# Allegro board LAUNCHXL-CC1350.brd
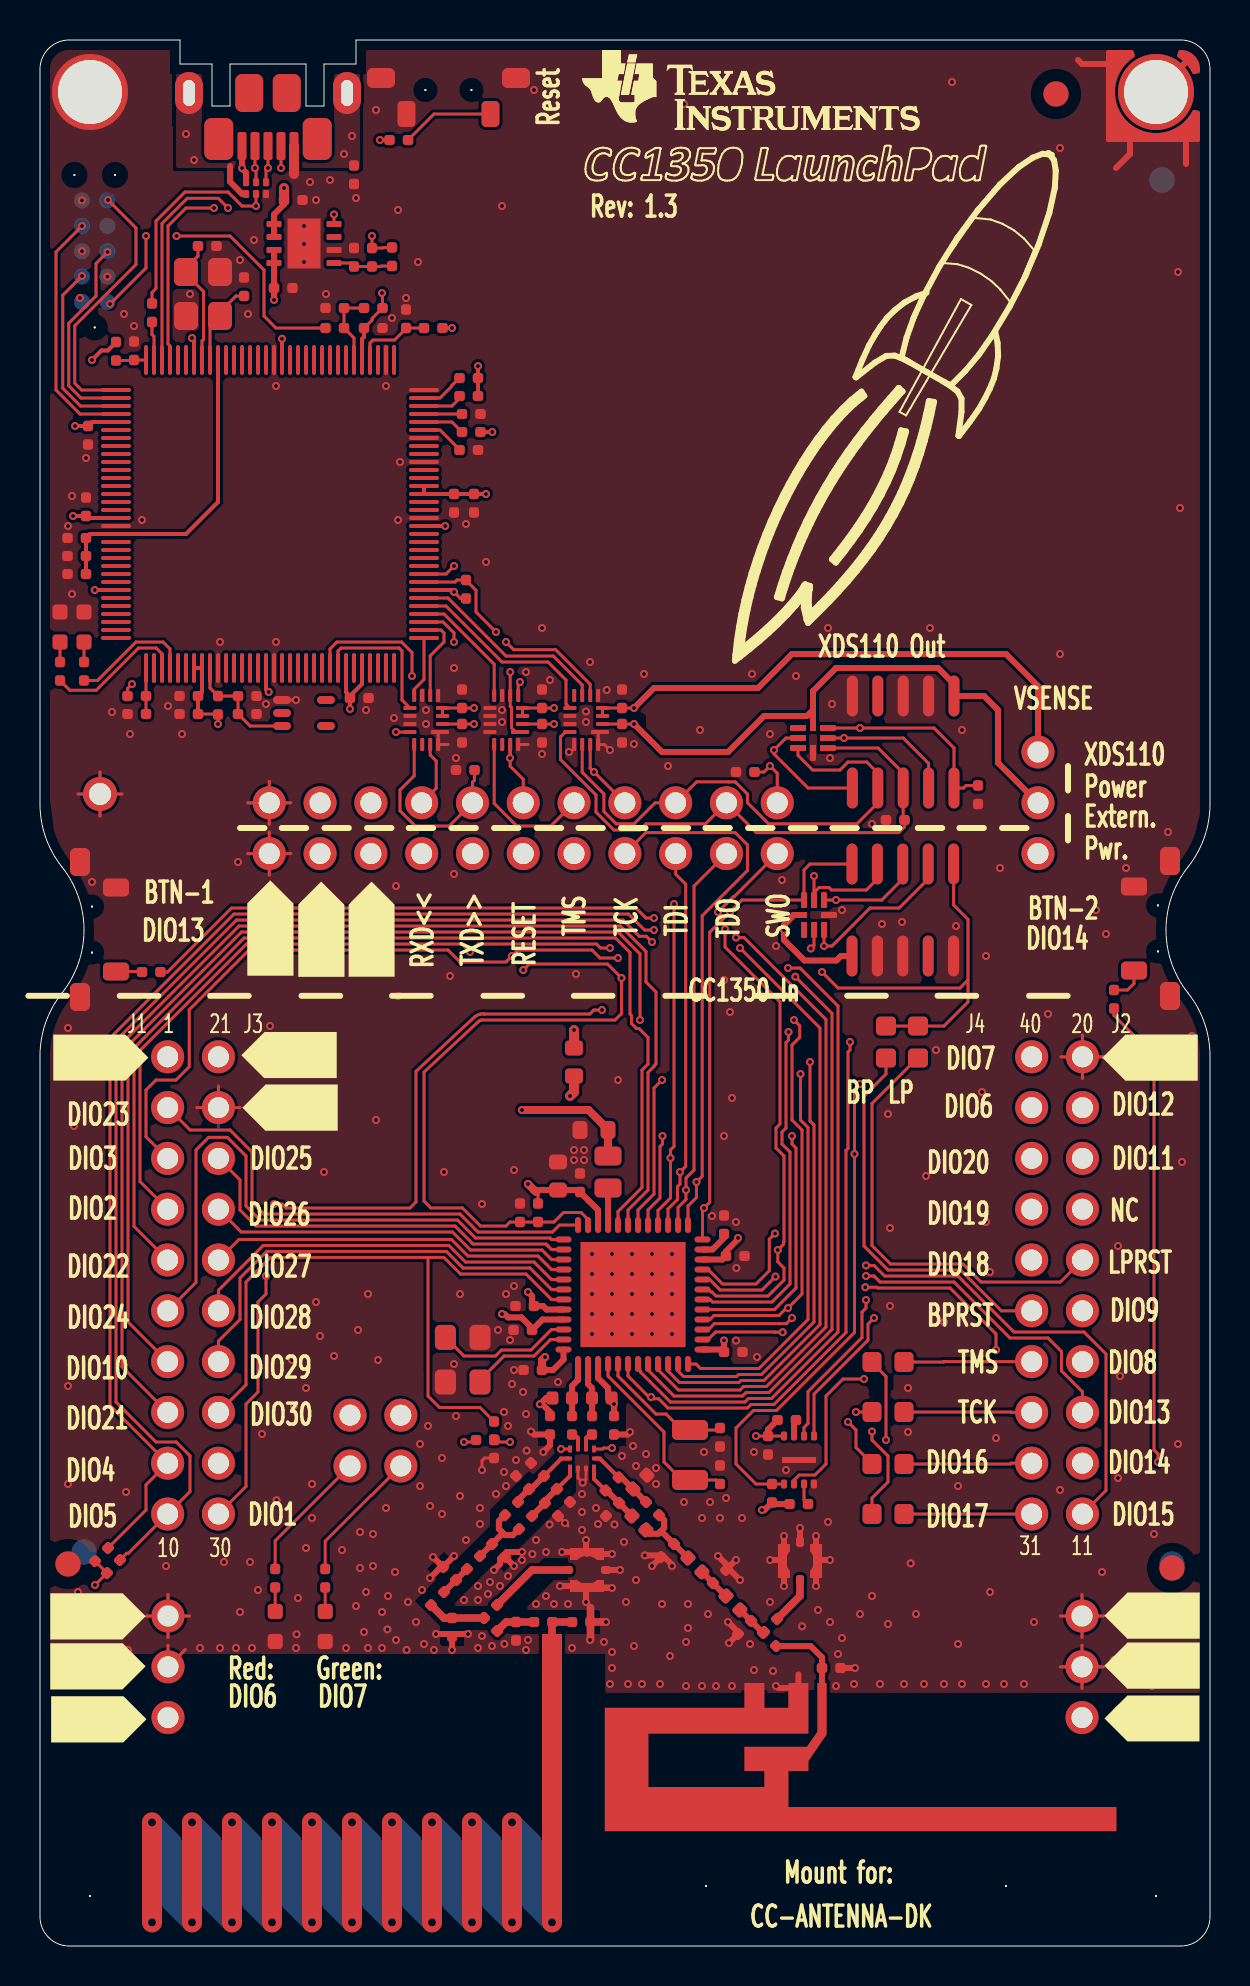
[diagram p0: board, top side]
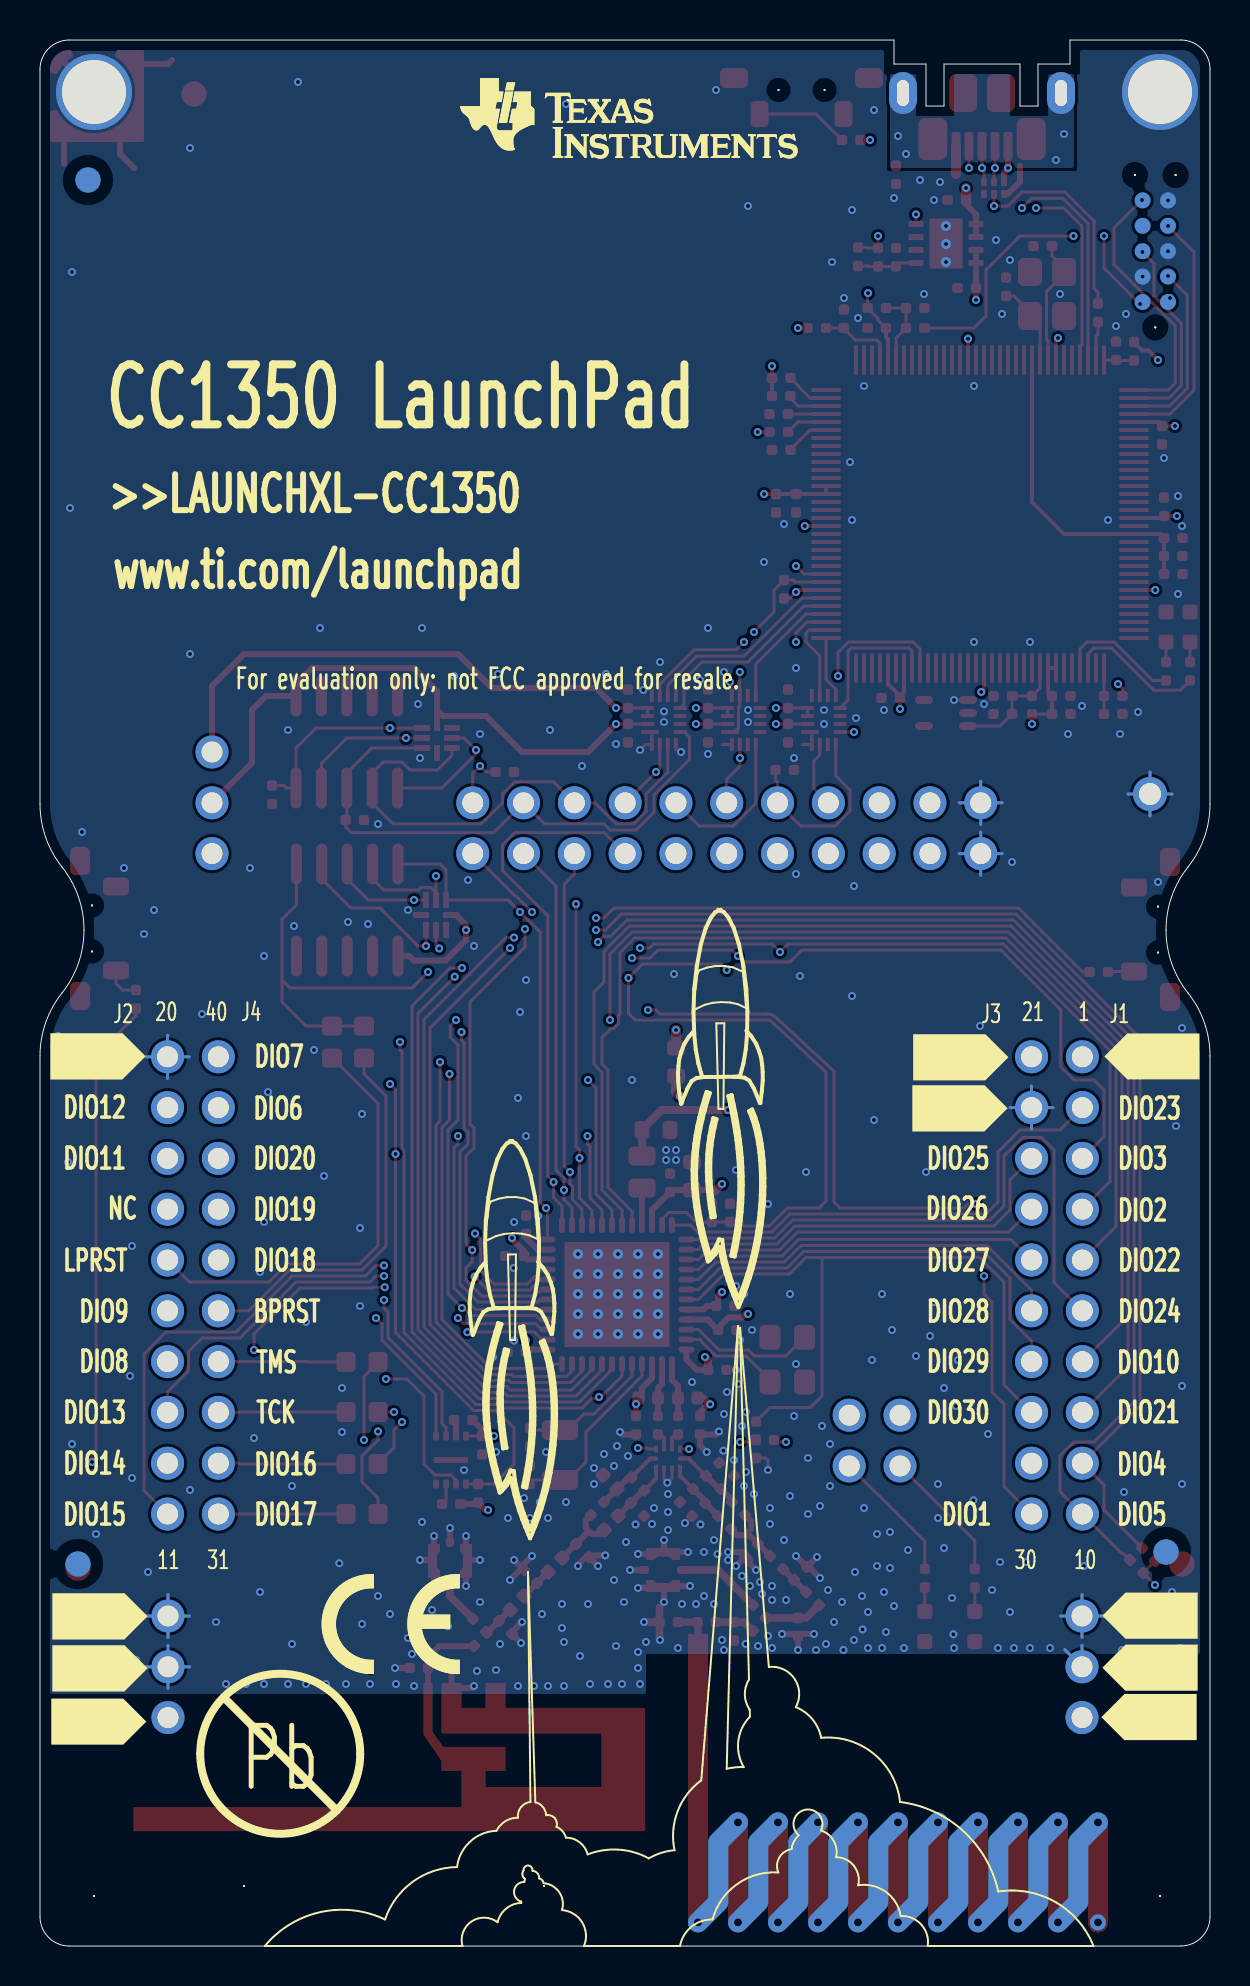
[diagram p1: board, bottom side, seen from below]

Outline 58.5 x 95.3 mm; copper layers: TOP, L2, L3, BOTTOM. Coordinates in mm from the lower left corner of the outline.
Outline path: 0,93.84 0,57.1 arc(0.28,55.43) 1.1,53.95 arc(1.92,52.47) 2.2,50.8 arc(1.92,49.13) 1.1,47.65 arc(0.28,46.17) 0,44.5 0,1.46 arc(0.43,0.43) 1.46,0 57.04,0 arc(58.07,0.43) 58.5,1.46 58.5,44.5 arc(58.22,46.17) 57.4,47.65 arc(56.58,49.13) 56.3,50.8 arc(56.58,52.47) 57.4,53.95 arc(58.22,55.43) 58.5,57.1 58.5,93.84 arc(58.07,94.87) 57.04,95.3 15.8,95.3 15.8,94.1 14.2,94.1 14.2,92 13.3,92 13.3,94.1 9.5,94.1 9.5,92 8.6,92 8.6,94.1 7,94.1 7,95.3 1.46,95.3 arc(0.43,94.87) 0,93.84

## Placement (name value [footprint] x y rotation side)
A1  Antenna PCB helix 868/915MHz  [ANTENNA868_915MHZ_A2N]  25.6 15.1 180 top
A2  2.4GHz  [ANTENNA_DN007AN]  39.1 12.9 180 top
C3  100nF  [CAPC1005X60B2N]  34.2 29.7 0 top
C4  100nF  [CAPC1005X60B2N]  34.3 34.5 0 top
C5  100nF  [CAPC1005X60B2N]  24.7 32 180 top
C6  22uF  [CAPC1608X100A2L]  25.9 37.8 90 top
C7  100nF  [CAPC1005X60B2N]  27 37.7 90 top
C8  22uF  [CAPC1608X100A2L]  28.4 40.8 180 top
C9  100nF  [CAPC1005X60B2N]  25.1 28.8 180 top
C11  3.6pF  [CAPC1005X60B2N]  25.9 21.5 135 top
C12  3.6pF  [CAPC1005X60B2N]  22.6 20.1 315 top
C13  5.6pF  [CAPC1005X60B2N]  20.8 18.3 135 top
C14  3.3pF  [CAPC1005X60B2N]  20.6 16.4 270 top
C15  100pF  [CAPC1005X60B2N]  22.2 16.4 315 top
C16  100nF  [CAPC1005X60B2N]  24.6 30.8 180 top
C17  12pF  [CAPC1005X60B2N]  34 23.1 90 top
C18  12pF  [CAPC1005X60B2N]  34 25.9 270 top
C19  1uF  [CAPC1005X60B2N]  34.2 35.6 90 top
C20  100nF  [CAPC1005X60B2N]  24 36.2 90 top
C21  1pF  [CAPC1005X60B2N]  28.3 21.5 45 top
C22  3.6pF  [CAPC1005X60B2N]  23.9 22.2 225 top
C23  DNM_0402  [CAPC1005X60B2N]  26.6 16.2 0 top
C24  12pF  [CAPC1005X60B2N]  36.8 15 135 top
C30  100nF  [CAPC1005X60B2N]  36.4 25.5 270 top
C32  100nF  [CAPC1005X60B2N]  9.9 62.5 0 top
C33  12pF  [CAPC1005X60B2N]  10.2 82.5 90 top
C34  12pF  [CAPC1005X60B2N]  7.9 85 0 top
C35  10nF  [CAPC1005X60B2N]  15.5 62.4 0 top
C36  10nF  [CAPC1005X60B2N]  2.3 71.5 90 top
C37  10nF  [CAPC1005X60B2N]  2.4 76 270 top
C38  100nF  [CAPC1005X60B2N]  16.2 80.9 0 top
C39  100nF  [CAPC1005X60B2N]  20.7 72.6 270 top
C40  1uF  [CAPC1005X60B2N]  21.7 72.6 270 top
C41  10nF  [CAPC1005X60B2N]  7.9 62.5 180 top
C42  1uF  [CAPC1005X60B2N]  7.9 61.6 180 top
C43  100nF  [CAPC1005X60B2N]  2.3 70.4 180 top
C44  1uF  [CAPC1005X60B2N]  2.3 69.5 180 top
C45  2.2uF  [CAPC1005X60B2N]  2.3 68.6 180 top
C46  100nF  [CAPC1005X60B2N]  18.3 80.9 90 top
C47  15pF  [CAPC1005X60B2N]  16.6 84.9 270 top
C48  2.2uF  [CAPC1005X60B2N]  12.2 87.3 0 top
C49  2.2uF  [CAPC1005X60B2N]  11.7 82.9 0 top
C50  10nF  [CAPC1005X60B2N]  9.9 61.6 0 top
C52  100nF  [CAPC1005X60B2N]  21.1 61.9 90 top
C53  100nF  [CAPC1005X60B2N]  21.1 61.1 270 top
C54  100nF  [CAPC1005X60B2N]  25.1 61.9 90 top
C55  100nF  [CAPC1005X60B2N]  25.1 61.1 270 top
C56  100nF  [CAPC1005X60B2N]  29.1 61.9 90 top
C57  100nF  [CAPC1005X60B2N]  29.1 61.1 270 top
C58  12pF  [CAPC1005X60B2N]  28.7 26.5 270 top
C59  1pF  [CAPC1005X60B2N]  39.1 13.9 0 top
C60  1pF  [CAPC1005X60B2N]  30.3 22.2 315 top
C61  DNM_0402  [CAPC1005X60B2N]  31.7 20.1 225 top
C62  3.6pF  [CAPC1005X60B2N]  34.3 18.8 225 top
C63  12pF  [CAPC1005X60B2N]  26.6 26.5 270 top
C64  12pF  [CAPC1005X60B2N]  27.6 26.5 270 top
C65  12pF  [CAPC1005X60B2N]  25.5 26.5 270 top
C67  DNM_0402  [CAPC1005X60B2N]  36.2 15.7 45 top
C68  1pF  [CAPC1005X60B2N]  34.9 15.6 45 top
C69  DNM_0402  [CAPC1005X60B2N]  22.2 16.4 45 top
C70  100nF  [CAPC1005X60B2N]  4.7 79.3 90 top
C71  DNM_0402  [CAPC1005X60B2N]  24.7 16.2 0 top
C72  3.6pF  [CAPC1005X60B2N]  26.5 22.2 135 top
C73  3.6pF  [CAPC1005X60B2N]  25.2 23.5 135 top
CR1  LPL296-J2L2-25  [LEDC1707X65L]  14.26 15.23 90 top
CR2  LS L296-P2Q2-1  [LEDC1708X67L]  11.76 15.23 90 top
CR4  LS L296-P2Q2-1  [LEDC1708X67L]  1 66.7 270 top
CR5  LPL296-J2L2-25  [LEDC1707X65L]  2.2 66.7 270 top
CR6  TPD4E004DRY  [SON50P100X145X60-6N]  10.3 87.6 0 top
CR7  TPD6E004RSER  [QFN50P150X150X60-8N]  37.9 60.9 270 top
CR8  TPD6E004RSER  [QFN50P150X150X60-8N]  38.2 50.8 0 top
FIDU1  FIDU_1.27mm  [FID127X142]  50.8 92.6 0 top
FIDU2  FIDU_1.27mm  [FID127X142]  1.4 19.1 0 top
FIDU3  FIDU_1.27mm  [FID127X142]  56.6 18.9 0 top
FIDU4  FIDU_1.27mm  [FID127X142]  56.1 88.3 180 bottom
FIDU5  FIDU_1.27mm  [FID127X142]  2.2 19.7 180 bottom
FIDU6  FIDU_1.27mm  [FID127X142]  56.6 19.1 180 bottom
FL1  BLM18HE152SN1  [FIL_BLM18HE152SN1DL]  26.7 43.5 90 top
J1  SSQ-110-23-L-D  [SAMTEC_SSQ11023LD_A2B]  6.38 44.46 0 bottom
J2  SSQ-110-23-L-D  [SAMTEC_SSQ11023LD_A2B]  49.58 44.46 0 bottom
J6  105164-0001  [MOLEX_1051640001_A2N]  10.1 90 0 top
L1  6.8uH  [INDC2012X150L]  28.4 37.9 90 top
L11  2.2nH  [IND_LQW15AN]  29.65 22.85 45 top
L12  6.8nH  [INDC1005X60B2N]  24.6 21.5 225 top
L13  6.8nH  [INDC1005X60B2N]  22 19.5 225 top
L14  7.5nH  [INDC1005X60B2N]  20.2 17.7 225 top
L21  2.2nH  [IND_LQW15AN]  29.6 21.5 315 top
L25  1.5nH  [IND_LQW15AN]  32.4 19.4 315 top
L26  2.2nH  [IND_LQW15AN]  34.3 17.5 315 top
L27  6.8nH  [INDC1005X60B2N]  23.8 23.5 315 top
L28  10nH  [IND_LQW15AN]  26.6 27.4 180 top
L29  10nH  [IND_LQW15AN]  27.6 27.4 0 top
L31  DNM  [INDC1005X60B2N]  28.93 23.43 225 top
L32  DNM  [INDC1005X60B2N]  23.8 16.2 270 top
LBL1  CE_label  [CE_LABEL]  41.8 13.6 180 bottom
LBL2  NON_COMPONENT_LABEL_8mm  [LABEL_PB-FREE_8MM_A2N]  50.7 5.4 180 bottom
M1  SNT-100-BK-G  [SAMTEC_SNT100BKG]  12.7 53.4 90 top
M2  SNT-100-BK-G  [SAMTEC_SNT100BKG]  15.3 53.4 90 top
M3  SNT-100-BK-G  [SAMTEC_SNT100BKG]  17.8 53.4 90 top
M4  SNT-100-BK-G  [SAMTEC_SNT100BKG]  20.3 53.4 90 top
M5  SNT-100-BK-G  [SAMTEC_SNT100BKG]  22.9 53.4 90 top
M6  SNT-100-BK-G  [SAMTEC_SNT100BKG]  25.4 53.4 90 top
M7  SNT-100-BK-G  [SAMTEC_SNT100BKG]  28 53.4 90 top
M8  SNT-100-BK-G  [SAMTEC_SNT100BKG]  30.5 53.4 90 top
M9  SNT-100-BK-G  [SAMTEC_SNT100BKG]  33.1 53.4 90 top
M10  SNT-100-BK-G  [SAMTEC_SNT100BKG]  35.6 53.4 90 top
M11  SNT-100-BK-G  [SAMTEC_SNT100BKG]  38.1 53.4 90 top
M12  SNT-100-BK-G  [SAMTEC_SNT100BKG]  51.2 55.9 90 top
M13  SNT-100-BK-G  [SAMTEC_SNT100BKG]  16.7 22.7 90 top
M14  SNT-100-BK-G  [SAMTEC_SNT100BKG]  19.3 22.7 90 top
MH1  HOLE_3.2mm_NPL  [MTG320]  2.5 2.5 0 top
MH2  HOLE_3.2mm_NPL  [MTG320]  55.8 2.5 0 top
MH3  HOLE_3.2mm_PTH  [MTG320_380]  2.5 92.7 0 top
MH4  HOLE_3.2mm_PTH  [MTG320_380]  55.8 92.7 0 top
MH5  HOLE_1.1mm_PTH  [MTG110_170]  3 57.6 0 top
NOREF  -  []  40.01 0 90 top
NOREF#2  -  []  53 10 0 top
NOREF#3  -  []  17.8 48.4 90 top
NOREF#4  -  []  0.6 43.2 0 top
NOREF#5  #VALUE  [unnamed#2]  33.3 3 0 top
NOREF#6  -  []  8.4 39.5 0 top
NOREF#7  -  []  8.4 42 0 top
NOREF#8  -  []  16.6 46 90 top
NOREF#9  -  []  51.5 11.6 0 top
NOREF#10  -  []  -1.8 14.1 0 top
NOREF#11  -  []  -1.9 8.8 0 top
NOREF#12  -  []  -1.8 11.6 0 top
NOREF#13  -  []  51.4 42 0 top
NOREF#14  -  []  51.5 14.1 0 top
NOREF#15  -  []  13.9 46.2 90 top
NOREF#16  -  []  0 79.15 0 top
NOREF#17  -  []  60.2 14.1 180 bottom
NOREF#18  -  []  17.2 39.5 180 bottom
NOREF#19  -  []  7.1 14.1 180 bottom
NOREF#20  -  []  51.53 65.52 180 bottom
NOREF#21  -  []  60.3 42.1 180 bottom
NOREF#22  -  []  17.3 41.9 180 bottom
NOREF#23  -  []  5.5 43.1 180 bottom
NOREF#24  -  []  7.1 8.9 180 bottom
NOREF#25  -  []  60.2 11.5 180 bottom
NOREF#26  -  []  7.1 11.5 180 bottom
NOREF#27  -  []  58 10 180 bottom
P1  BB02-HC031-KB1-603000  [GRADCONN_BB02HC031KB1603000_A2B]  52.1 11.42 90 top
P2  BB02-HC031-KB1-603000  [GRADCONN_BB02HC031KB1603000_A2B]  6.4 11.42 90 top
P4  BB02-HJ221-KB1-603000  [GRADCONN_BB02HJ221KB160300_A2B]  36.86 57.16 180 top
P5  FTSH-105-01-F-DV-K  [SAMTEC_FTSH-105-01-F-DV-K-10L]  40.6 49.5 0 top
P6  BB02-HJ041-KB1-603000  [GRADCONN_BB02HJ041KB1603000_A2B]  15.5 24 0 top
P7  FTSH-105-01-F-DV-K  [SAMTEC_FTSH-105-01-F-DV-K-10L]  45.7 62.5 180 top
P8  TC2050-IDC-NL  [TAGCONNECT_TC2050IDCNLN]  2.1 82.2 90 bottom
P10  BB02-HC031-KB1-603000  [GRADCONN_BB02HC031KB1603000_A2B]  49.9 59.7 270 top
P11  MM5829-2700  [MURATA_MM58292700RJ4_A2N]  26.4 18.8 0 top
P12  MM5829-2700  [MURATA_MM58292700RJ4_A2N]  38 18.3 90 top
R1  100k  [RESC1005X40B2N]  24.9 36.2 90 top
R2  3.3k  [RESC1005X40B2N]  3.4 19.9 225 top
R3  3.3k  [RESC1005X40B2N]  4 19.3 225 top
R11  2.2k  [RESC1005X40B2N]  36.6 23.1 270 top
R14  220  [RESC1005X40B2N]  11.76 17.93 90 top
R15  180  [RESC1005X40B2N]  14.26 17.93 90 top
R17  10k  [RESC1005X40B2N]  16.2 81.9 0 top
R18  4.7k  [RESC1005X40B2N]  8.9 62.5 270 top
R19  DNM  [RESC1005X40B2N]  5.6 81.2 90 top
R20  100  [RESC1005X40B2N]  15.2 80.9 180 top
R21  DNM  [RESC1005X40B2N]  15.2 81.9 180 top
R22  330k  [RESC1005X40B2N]  5.3 62.5 180 top
R23  180  [RESC1005X40B2N]  1 64.2 270 top
R24  220k  [RESC1005X40B2N]  5.3 61.6 180 top
R25  220  [RESC1005X40B2N]  2.2 64.2 270 top
R27  1k  [RESC1005X40B2N]  21.9 77.5 180 top
R28  4.87k  [RESC1005X40B2N]  21.9 74.8 180 top
R29  1k  [RESC1005X40B2N]  21.1 76.6 0 top
R30  1k  [RESC1005X40B2N]  21.1 75.7 0 top
R31  51  [RESC1005X40B2N]  19.2 80.9 0 top
R32  33k  [RESC1005X40B2N]  15.7 88.1 90 top
R33  51k  [RESC1005X40B2N]  17.6 84 90 top
R34  30k  [RESC1005X40B2N]  15.7 84.9 270 top
R39  1k  [RESC1005X40B2N]  21.9 78.4 180 top
R46  DNM  [RESC1608X55N]  43.2 29.2 180 top
R47  DNM  [RESC1608X55N]  43.2 26.7 180 top
R48  DNM  [RESC1608X55N]  43.2 24.1 180 top
R49  DNM  [RESC1608X55N]  43.2 21.6 180 top
R51  DNM  [RESC1608X55N]  43.9 44.4 90 top
R52  0  [RESC1608X55N]  42.3 46 270 top
R55  100  [RESC1005X40B2N]  53.7 47.8 270 top
R56  100  [RESC1005X40B2N]  5.1 48.7 0 top
R57  100  [RESC1005X40B2N]  18.4 90.3 180 top
R58  3.3k  [RESC1005X40B2N]  21.3 68.3 270 top
R59  DNM  [RESC1005X40B2N]  38.4 22.1 180 top
R60  DNM  [RESC1005X40B2N]  37.8 26.3 180 top
R61  100k  [RESC1005X40B2N]  20.8 58.8 0 top
R62  100k  [RESC1005X40B2N]  34.8 58.7 0 top
R63  100k  [RESC1005X40B2N]  42.3 56.3 0 top
R65  100k  [RESC1005X40B2N]  46.9 57.1 90 top
R66  100  [RESC1005X40B2N]  3.8 80.2 270 top
R67  DNM  [RESC1005X40B2N]  21.8 25.3 0 top
R68  DNM  [RESC1005X40B2N]  22.7 24.4 90 top
R69  0  [RESC1005X40B2N]  22.7 25.3 90 top
SW1  1188E-1K2-V  [SW_1188E1K2V_A2N]  2 54.2 270 top
SW2  1188E-1K2-V  [SW_1188E1K2V_A2N]  56.5 47.5 90 top
SW3  1188E-1K2-V  [SW_1188E1K2V_A2N]  23.8 93.4 180 top
U1  CC1350F128RGZ  [QFNFC50P700X700X80-49CN]  26.9 29.1 0 top
U4  MX25R8035FZUIL0  [SON50P300X200X60-9B2L]  37.2 23.1 0 top
U5  TM4C1294NCPDTT3R  [QFP40P1600X1600X120-128N]  5.3 63.9 0 top
U6  LM4040B25IDCK  [SOT65P210X110-5N]  12.1 62.3 270 top
U7  TPS79601DR  [SON65P300X300X100-9AL]  11.7 86.1 270 top
U8  SN74AVC4T245RSV  [QFNFC40P180X260X55-16A2L]  20 60.7 90 top
U9  SN74AVC4T245RSV  [QFNFC40P180X260X55-16A2L]  28 60.7 90 top
U10  SN74AVC4T245RSV  [QFNFC40P180X260X55-16A2L]  24 60.7 90 top
U11  XMSSJE3G0PA-003  [SW_XMSSJE3G0PA003_A2N]  26.5 23.9 0 top
UNK#REFDES  -  []  28.1 94.8 0 top
UNK#REFDES#2  -  []  36.5 93.4 180 bottom
Y1  32.768kHz  [XTAL_FC-135N]  32.5 23.3 90 top
Y2  24MHz  [OSCCC250X320X60-4L]  22 28.2 90 top
Y3  16MHz  [OSCCC250X320X100-4BN]  9 81.5 90 top

## Library data of the parts
A1 = ANTENNA: User Part Number: #PN
A2 = ANTENNA_DN007
C3-C5 C7 C9 C11-C24 C30 C32-C50 C52-C65 C67-C73 = CAPACITOR: User Part Number: #PN
C6 C8 = CAPACITOR: User Part Number: #PN; alternate symbols: (CAPC1608X100A2L,CAPC1608X100A2M)
CR1 CR5 = LED: alternate symbols: (LEDC1707X65L,LEDC1707X65M)
CR2 CR4 = LED: alternate symbols: (LEDC1708X67L,LEDC1708X67M)
CR6 = DIODE_TPD4E004_SON6: User Part Number: #PN; alternate symbols: (SON50P100X145X65-6L,SON50P100X145X65-6M)
CR7 CR8 = DIODE_TVS_TPD6E004_QFN8_V1_0: alternate symbols: (QFN50P150X150X60-8L,QFN50P150X150X60-8M,QFN50P150X150X60-8AL)
FIDU1-FIDU6 = FIDMARK
FL1 = FILTER_2PIN: alternate symbols: (FIL_BLM18HE152SN1DL,FIL_BLM18HE152SN1DM)
J1 J2 = CONN_HEADER_2X10_J_S_V1: User Part Number: #PN; alternate symbols: (SAMTEC_SSQ11023LD_A2C,SAMTEC_SSQ11023LD_A2A)
J6 = CONN_USB_MICRO_B_2MH: User Part Number: #PN; alternate symbols: (MOLEX_1051640001_A2L,MOLEX_1051640001_A2M)
L1 = INDUCTOR: alternate symbols: (INDC2012X150L,INDC2012X150M)
L11 L21 L26 = INDUCTOR: alternate symbols: (IND_LQW15AL,IND_LQW15AM)
L12-L14 L27 L31 L32 = INDUCTOR: User Part Number: #PN
L25 L28 L29 = INDUCTOR: alternate symbols: (IND_LQW15AM,IND_LQW15AL)
LBL1 = CE_LABEL
LBL2 = LABEL_Pb-free_V1: User Part Number: #PN
M1-M14 = MECH_SHUNT_JUMPER_V1: User Part Number: #PN
MH1 MH2 = HOLE_NPL
MH3-MH5 = HOLE_PTH
NOREF#5 = -: User Part Number: #PN
P1 P2 P10 = CONN_HEADER_3_P_S: User Part Number: #PN; alternate symbols: (GRADCONN_BB02HC031KB1603000_A2C,GRADCONN_BB02HC031KB1603000_A2A)
P4 = CONN_HEADER_2X11_P_S: User Part Number: #PN; alternate symbols: (GRADCONN_BB02HJ221KB160300_A2C,GRADCONN_BB02HJ221KB160300_A2A)
P5 P7 = CONN_HEADER_2X5: alternate symbols: (SAMTEC_FTSH-105-01-F-DV-K-10L,SAMTEC_FTSH-105-01-F-DV-K-10M)
P6 = CONN_HEADER_2X2_P: User Part Number: #PN; alternate symbols: (GRADCONN_BB02HJ041KB1603000_A2C,GRADCONN_BB02HJ041KB1603000_A2A)
P8 = CONN_IDC_TC2050-IDC-NL: User Part Number: #PN; alternate symbols: (TAGCONNECT_TC2050IDCNLL,TAGCONNECT_TC2050IDCNLM)
P11 P12 = CONN_COAX_1_1_P_2MH_V1: User Part Number: #PN; alternate symbols: (MURATA_MM58292700RJ4_A2L,MURATA_MM58292700RJ4_A2M)
R1-R3 R11 R14 R15 R17-R25 R27-R34 R39 R55-R63 R65-R69 = RESISTOR: User Part Number: #PN
R46-R49 R51 R52 = RESISTOR: alternate symbols: (RESC1608X55L,RESC1608X55M)
SW1-SW3 = SWITCH_TACT_V2: alternate symbols: (SW_1188E1K2V_A2L,SW_1188E1K2V_A2M)
U1 = IC_RF_CC13XX_7X7_QFN48_V2: alternate symbols: (QFNFC50P700X700X80-49CL,QFNFC50P700X700X80-49CM)
U4 = IC_FLASH_MX25R8035F_USON8: User Part Number: #PN; alternate symbols: (SON50P300X200X60-9B2L,SON50P300X200X60-9B2M)
U5 = IC_PROC_TM4C1294NCPDT_TQFP128: alternate symbols: (QFP40P1600X1600X120-128L,QFP40P1600X1600X120-128M)
U6 = IC_REF_LM4040_SC70-5: alternate symbols: (SOT65P210X110-5L,SOT65P210X110-5M)
U7 = IC_PM_TPS79601_SON8: alternate symbols: (SON65P300X300X100-9AL,SON65P300X300X100-9AM)
U8-U10 = IC_XCVR_SN74AVC4T245_UQFN16_2: User Part Number: #PN; alternate symbols: (QFNFC40P180X260X55-16A2L,QFNFC40P180X260X55-16A2M)
U11 = IC_SWITCH_XMSSJE3G0PA-00: User Part Number: #PN
Y1 = CRYSTAL: alternate symbols: (XTAL_FC-135L,XTAL_FC-135M)
Y2 = XTAL_4PIN_S: alternate symbols: (OSCCC250X320X60-4L,OSCCC250X320X60-4M)
Y3 = XTAL_4: alternate symbols: (OSCCC250X320X100-4BL,OSCCC250X320X100-4BM)

## Footprints (pads in the part's own frame, mm; a bottom-side part is the same pattern mirrored in y, then rotated)
ANTENNA868_915MHZ_A2N
  rect 1x1 smd: 1(0,0)
ANTENNA_DN007AN
  rect 0.46x0.5 smd: 1(0,0)
  rect 1.001x0.5 smd: 2(1.18,0) 3(3.38,0)
CAPC1005X60B2N
  custom 0.524x0.5 smd: 1(0,0) 2(0.924,0)
CAPC1608X100A2L
  custom 0.75x0.9 smd: 1(0,0) 2(1.4,0)
CE_LABEL
  oval 0.025x0.051 smd: 1(-0.15,0.1)
FID127X142
  round 1.27 smd: 1(0,0)
FIL_BLM18HE152SN1DL
  custom 0.752x0.9 smd: 1(0,0) 2(1.4,0)
GRADCONN_BB02HC031KB1603000_A2B
  round 1.65 hole 1.05: 1(0,0) 2(2.54,0) 3(5.08,0)
GRADCONN_BB02HJ041KB1603000_A2B
  round 1.65 hole 1.05: 1(0,0) 2(0,2.54) 3(2.54,0) 4(2.54,2.54)
GRADCONN_BB02HJ221KB160300_A2B
  round 1.65 hole 1.05: 1(0,0) 2(0,2.54) 3(2.54,0) 4(2.54,2.54) 5(5.08,0) 6(5.08,2.54) 7(7.62,0) 8(7.62,2.54) 9(10.16,0) 10(10.16,2.54) 11(12.7,0) 12(12.7,2.54) 13(15.24,0) 14(15.24,2.54) 15(17.78,0) 16(17.78,2.54) 17(20.32,0) 18(20.32,2.54) 19(22.86,0) 20(22.86,2.54) 21(25.4,0) 22(25.4,2.54)
IND_LQW15AN
  custom 0.6x0.65 smd: 1(0,0) 2(0.98,0)
INDC1005X60B2N
  custom 0.524x0.5 smd: 1(0,0) 2(0.924,0)
INDC2012X150L
  custom 0.95x1.352 smd: 1(0,0) 2(1.6,0)
LEDC1707X65L
  custom 0.752x0.752 smd: 1(0,0) 2(1.501,0)
LEDC1708X67L
  custom 0.752x0.752 smd: 1(0,0) 2(1.501,0)
MOLEX_1051640001_A2N
  custom 1.45x2.1 smd: (-1.162,0.35) (3.762,0.35)
  custom 1.4x1.9 smd: (0.362,2.65) (2.238,2.65)
  custom 0.45x1.4 smd: 1(0,0) 2(0.65,0) 3(1.3,0) 4(1.95,0) 5(2.6,0)
  oval 1.4x2.1 hole 0.6x1.3: M1(-2.65,2.65) M2(5.25,2.65)
MTG110_170
  round 1.699 hole 1.1: 1(0,0)
MTG320
  round 0.099 hole 3.2 unplated: (0,0)
MTG320_380
  round 3.8 hole 3.2: 1(0,0)
MURATA_MM58292700RJ4_A2N
  custom 0.5x0.4 smd: 1(0,0) 2(1.9,0)
  custom 1.7x0.6 smd: M1(0.95,-0.8) M2(0.95,0.8)
OSCCC250X320X60-4L
  custom 1.25x1.052 smd: 1(0,0) 2(2.23,0) 3(2.23,1.73) 4(0,1.73)
OSCCC250X320X100-4BN
  custom 1.402x1.198 smd: 1(0,0) 2(2.2,0) 3(2.2,1.699) 4(0,1.699)
QFN50P150X150X60-8N
  custom 0.3x0.8 smd: 1(0,0) 2(0.5,0) 3(1,0) 5(1,1.5) 6(0.5,1.5) 7(0,1.5)
  custom 0.8x0.3 smd: 4(1.25,0.75) 8(-0.25,0.75)
QFNFC40P180X260X55-16A2L
  custom 0.2x0.9 smd: 1(0,0)
  custom 0.2x0.65 smd: 2(0.4,-0.125) 3(0.8,-0.125) 4(1.2,-0.125) 9(1.2,1.505) 10(0.8,1.505) 11(0.4,1.505) 12(0,1.505)
  custom 0.65x0.2 smd: 5(1.825,0.09) 6(1.825,0.49) 7(1.825,0.89) 8(1.825,1.29) 13(-0.625,1.29) 14(-0.625,0.89) 15(-0.625,0.49) 16(-0.625,0.09)
QFNFC50P700X700X80-49CN
  oval 0.3x0.8 smd: 1(0,0) 2(0.5,0) 3(1.001,0) 4(1.501,0) 5(1.999,0) 6(2.499,0) 7(3,0) 8(3.5,0) 9(4,0) 10(4.501,0) 11(5.001,0) 12(5.499,0) 25(5.499,6.949) 26(5.001,6.949) 27(4.501,6.949) 28(4,6.949) 29(3.5,6.949) 30(3,6.949) 31(2.499,6.949) 32(1.999,6.949) 33(1.501,6.949) 34(1.001,6.949) 35(0.5,6.949) 36(0,6.949)
  oval 0.8x0.3 smd: 13(6.226,0.724) 14(6.226,1.224) 15(6.226,1.725) 16(6.226,2.225) 17(6.226,2.725) 18(6.226,3.226) 19(6.226,3.726) 20(6.226,4.224) 21(6.226,4.724) 22(6.226,5.225) 23(6.226,5.725) 24(6.226,6.226) 37(-0.724,6.226) 38(-0.724,5.725) 39(-0.724,5.225) 40(-0.724,4.724) 41(-0.724,4.224) 42(-0.724,3.726) 43(-0.724,3.226) 44(-0.724,2.725) 45(-0.724,2.225) 46(-0.724,1.725) 47(-0.724,1.224) 48(-0.724,0.724)
  rect 5.25x5.25 smd: 49(2.751,3.475)
QFP40P1600X1600X120-128N
  oval 0.201x1.501 smd: 1(0,0) 2(0.399,0) 3(0.8,0) 4(1.199,0) 5(1.6,0) 6(1.999,0) 7(2.4,0) 8(2.799,0) 9(3.2,0) 10(3.599,0) 11(4,0) 12(4.399,0) 13(4.801,0) 14(5.199,0) 15(5.601,0) 16(6,0) 17(6.401,0) 18(6.8,0) 19(7.201,0) 20(7.6,0) 21(8.001,0) 22(8.4,0) 23(8.801,0) 24(9.2,0) 25(9.601,0) 26(10,0) 27(10.399,0) 28(10.8,0) 29(11.199,0) 30(11.6,0) 31(11.999,0) 32(12.4,0) 65(12.4,15.4) 66(11.999,15.4) 67(11.6,15.4) 68(11.199,15.4) 69(10.8,15.4) 70(10.399,15.4) 71(10,15.4) 72(9.601,15.4) 73(9.2,15.4) 74(8.801,15.4) 75(8.4,15.4) 76(8.001,15.4) 77(7.6,15.4) 78(7.201,15.4) 79(6.8,15.4) 80(6.401,15.4) 81(6,15.4) 82(5.601,15.4) 83(5.199,15.4) 84(4.801,15.4) 85(4.399,15.4) 86(4,15.4) 87(3.599,15.4) 88(3.2,15.4) 89(2.799,15.4) 90(2.4,15.4) 91(1.999,15.4) 92(1.6,15.4) 93(1.199,15.4) 94(0.8,15.4) 95(0.399,15.4) 96(0,15.4)
  oval 1.501x0.201 smd: 33(13.899,1.501) 34(13.899,1.9) 35(13.899,2.301) 36(13.899,2.7) 37(13.899,3.099) 38(13.899,3.5) 39(13.899,3.899) 40(13.899,4.3) 41(13.899,4.699) 42(13.899,5.1) 43(13.899,5.499) 44(13.899,5.9) 45(13.899,6.299) 46(13.899,6.7) 47(13.899,7.099) 48(13.899,7.501) 49(13.899,7.899) 50(13.899,8.301) 51(13.899,8.7) 52(13.899,9.101) 53(13.899,9.5) 54(13.899,9.901) 55(13.899,10.3) 56(13.899,10.701) 57(13.899,11.1) 58(13.899,11.501) 59(13.899,11.9) 60(13.899,12.301) 61(13.899,12.7) 62(13.899,13.099) 63(13.899,13.5) 64(13.899,13.899) 97(-1.501,13.899) 98(-1.501,13.5) 99(-1.501,13.099) 100(-1.501,12.7) 101(-1.501,12.301) 102(-1.501,11.9) 103(-1.501,11.501) 104(-1.501,11.1) 105(-1.501,10.701) 106(-1.501,10.3) 107(-1.501,9.901) 108(-1.501,9.5) 109(-1.501,9.101) 110(-1.501,8.7) 111(-1.501,8.301) 112(-1.501,7.899) 113(-1.501,7.501) 114(-1.501,7.099) 115(-1.501,6.7) 116(-1.501,6.299) 117(-1.501,5.9) 118(-1.501,5.499) 119(-1.501,5.1) 120(-1.501,4.699) 121(-1.501,4.3) 122(-1.501,3.899) 123(-1.501,3.5) 124(-1.501,3.099) 125(-1.501,2.7) 126(-1.501,2.301) 127(-1.501,1.9) 128(-1.501,1.501)
RESC1005X40B2N
  custom 0.524x0.5 smd: 1(0,0) 2(0.924,0)
RESC1608X55N
  custom 0.95x1 smd: 1(0,0) 2(1.6,0)
SAMTEC_FTSH-105-01-F-DV-K-10L
  oval 0.551x2.05 smd: 1(0,0) 2(0,4.6) 3(1.27,0) 4(1.27,4.6) 5(2.54,0) 6(2.54,4.6) 7(3.81,0) 8(3.81,4.6) 9(5.08,0) 10(5.08,4.6)
SAMTEC_SSQ11023LD_A2B
  round 1.65 hole 1.05: 1(0,0) 2(2.54,0) 3(0,2.54) 4(2.54,2.54) 5(0,5.08) 6(2.54,5.08) 7(0,7.62) 8(2.54,7.62) 9(0,10.16) 10(2.54,10.16) 11(0,12.7) 12(2.54,12.7) 13(0,15.24) 14(2.54,15.24) 15(0,17.78) 16(2.54,17.78) 17(0,20.32) 18(2.54,20.32) 19(0,22.86) 20(2.54,22.86)
SON50P100X145X60-6N
  custom 0.3x0.402 smd: 1(0,0) 2(0.5,0) 3(1.001,0) 4(1.001,0.589) 5(0.5,0.589) 6(0,0.589)
SON50P300X200X60-9B2L
  custom 0.3x0.45 smd: 1(0,0) 2(0.5,0) 3(1,0) 4(1.5,0) 5(1.5,2.4) 6(1,2.4) 7(0.5,2.4) 8(0,2.4)
  rect 1.7x0.3 smd: 9(0.75,1.2)
SON65P300X300X100-9AL
  custom 0.3x0.75 smd: 1(0,0) 2(0.65,0) 3(1.3,0) 4(1.95,0) 5(1.95,3) 6(1.3,3) 7(0.65,3) 8(0,3)
  rect 2.5x1.65 smd: 9(0.975,1.5)
SOT65P210X110-5N
  oval 0.399x0.899 smd: 1(0,0) 2(0.65,0) 3(1.3,0) 4(1.3,2.2) 5(0,2.2)
SW_1188E1K2V_A2N
  round 0.099 hole 0.899 unplated: (2.229,0.6) (4.529,0.6)
  custom 1.4x1 smd: 1(0,0) 2(6.75,0)
  custom 0.9x1.3 smd: 3(1.275,1.8) 4(5.475,1.8)
SW_XMSSJE3G0PA003_A2N
  custom 0.2x0.35 smd: 1(0,0) 4(1.2,0) 6(1.2,0.95) 9(0,0.95)
  custom 0.2x0.3 smd: 2(0.4,-0.025) 3(0.8,-0.025) 7(0.8,0.975) 8(0.4,0.975)
  custom 0.35x0.2 smd: 5(1.275,0.475) 10(-0.075,0.475)
TAGCONNECT_TC2050IDCNLN
  round 0.099 hole 1.001 unplated: (-1.27,0.635) (6.35,-0.38) (6.35,1.65)
  round 0.8 smd: 1(0,0) 2(1.27,0) 3(2.54,0) 4(3.81,0) 5(5.08,0) 6(5.08,1.27) 7(3.81,1.27) 8(2.54,1.27) 9(1.27,1.27) 10(0,1.27)
unnamed#2
  round 0.099 hole 3.2 unplated: (0,0) (15,0)
XTAL_FC-135N
  custom 1x1.798 smd: 1(0,0) 2(2.499,0)

## Nets
+5V: J1.2 P2.1 P4.20
GND: A2.2(GND_2) A2.3(GND_3) C3.2 C4.2 C5.2 C6.2 C7.2 C8.2 C9.2 C11.1 C12.2 C13.2 C14.2 C16.2 C17.2 C18.2 C19.2 C20.2 C21.1 C23.2 C30.2 C32.2 C33.2 C34.2 C35.2 C36.2 C37.2 C38.2 C39.2 C40.2 C41.2 C42.2 C43.2 C44.2 C45.2 C46.2 C48.2 C49.2 C50.2 C52.2 C53.2 C54.2 C55.2 C56.2 C57.2 C58.2 C59.2 C61.2 C62.1 C65.2 C68.1 C70.2 C72.1 C73.2 CR1.1(C) CR2.1(C) CR4.1(C) CR5.1(C) CR6.3 CR7.4(GND) CR8.4(GND) J1.4 J2.2 J6.5(GND) L11.2 L27.1 L32.2 MH3.1 MH4.1 MH5.1 P1.2 P1.3 P2.2 P2.3 P4.21 P4.22 P5.3 P5.5 P5.9 P7.3 P7.5 P7.9 P8.3(7) P8.5(8) P8.9(10) P11.2 P11.M1 P11.M2 P12.2 P12.M1 P12.M2 R21.2 R24.2 R28.1 R29.2 R32.1 R34.1 R61.1 R62.1 R63.1 R65.1 R68.1 SW1.1 SW1.2 SW1.3 SW2.1 SW2.2 SW2.4 SW3.1 SW3.2 SW3.4 U1.49(VSS) U4.4(GND) U4.9(EGP) U5.10(GNDA) U5.17(GND#17) U5.48(GND#48) U5.55(GND#55) U5.58(GND#58) U5.64(NWAKE) U5.66(XOSC0) U5.80(GND#80) U5.114(GND#114) U6.1(ANODE) U7.6(GND) U7.9(GND/TAB) U8.1(1NOE) U8.5(2DIR) U8.7(1A2) U8.10(GND#10) U8.11(GND#11) U8.16(2NOE) U9.1(1NOE) U9.5(2DIR) U9.10(GND#10) U9.11(GND#11) U9.13(2B1) U9.16(2NOE) U10.7(1A2) U10.9(2A2) U10.10(GND#10) U10.11(GND#11) U10.12(2B2) U10.16(2NOE) U11.2(GND#2) U11.3(GND#3) Y2.2 Y2.4 Y3.2(GND) Y3.4(NC_4)
VDDC: C43.1 C44.1 C45.1 U5.87(VDDC#87) U5.115(VDDC#115)
VDDR: C8.1 C9.1 C16.1 L1.2 U1.45(VDDR#45) U1.48(VDDR#48)
VDDS: C3.1 C4.1 C5.1 C6.1 C7.1 FL1.1 R1.2 R67.1 U1.13(VDDS2) U1.22(VDDS3) U1.34(VDDS_DCDC) U1.44(VDDS)
CC1350_RESET: C20.1 CR8.2(IO2) P4.12 P5.10 R1.1 R51.2 R52.1 U1.35(RESET_N)
CC1350_RXD: J1.7 P4.16 U1.7(DIO_2)
CC1350_SW_PWR: J1.16 R69.2 U1.43(DIO_30)
CC1350_SWO: J2.9 P4.2 U1.28(DIO_18)
CC1350_TCK: CR8.6(IO5) P4.8 P5.4 R47.2 U1.25(JTAG_TCKC)
CC1350_TMS: CR8.7(IO6) P4.10 P5.2 R46.2 U1.24(JTAG_TMSC)
CC1350_TXD: J1.5 P4.14 U1.8(DIO_3)
CC1350_VDD: C30.1 CR8.8(VCC) FL1.2 J1.1 P1.1 P4.18 P5.1 P10.3 R2.2 R3.2 R11.2 R59.2 R60.2 U4.8(VCC)
DCDC_SW: L1.1 U1.33(DCDC_SW)
DIO1_RF_SW: J1.20 U1.6(DIO_1) U11.6(CTL)
DIO4_SCL: J1.17 R2.1 U1.9(DIO_4)
DIO5_SDA: J1.19 R3.1 U1.10(DIO_5)
DIO6_RLED: J2.3 P6.2 U1.11(DIO_6)
DIO7_GLED: J2.1 P6.4 U1.12(DIO_7)
DIO8_MISO: J2.14 U1.14(DIO_8) U4.2(SO/SIO1)
DIO9_MOSI: J2.12 U1.15(DIO_9) U4.5(SI/SIO0)
DIO10_SCLK: J1.13 U1.16(DIO_10) U4.6(SCLK)
DIO11_CS: J2.6 U1.17(DIO_11)
DIO12: J2.4 U1.18(DIO_12)
DIO13_BTN1: J2.16 R56.2 U1.19(DIO_13)
DIO14_BTN2: J2.18 R55.2 U1.20(DIO_14)
DIO15: J2.20 U1.21(DIO_15)
DIO16_TDO: CR8.5(IO4) P4.4 P5.6 R48.2 U1.26(DIO_16)
DIO17_TDI: CR8.3(IO3) P4.6 P5.8 R49.2 U1.27(DIO_17)
DIO19_CTS: J2.7 U1.29(DIO_19)
DIO20_FLASH_CS: J2.5 R11.1 U1.30(DIO_20) U4.1(NCS)
DIO21: J1.15 U1.31(DIO_21)
DIO22: J1.9 U1.32(DIO_22)
DIO23_ANALOG: J1.3 U1.36(DIO_23)
DIO24_ANALOG: J1.11 U1.37(DIO_24)
DIO25_ANALOG: J1.6 U1.38(DIO_25)
DIO26_ANALOG: J1.8 U1.39(DIO_26)
DIO27_ANALOG: J1.10 U1.40(DIO_27)
DIO28_ANALOG: J1.12 U1.41(DIO_28)
DIO29_ANALOG: J1.14 U1.42(DIO_29)
IRSTN: P8.10(5) R20.2
ITCK: P8.4(2) U5.100(PC0/TCK/SWCLK)
ITDI: P8.8(4) U5.98(PC2/TDI)
ITDO: P8.6(3) U5.97(PC3/TDO/SWO)
ITMS: P8.2(1) U5.99(PC1/TMS/SWDIO)
LP_RESET: J2.10 R51.1
USB_DM: CR6.5 J6.2(D-) U5.93(PL7/USB0DM)
USB_DP: CR6.4 J6.3(D+) U5.94(PL6/USB0DP)
USB_ID: CR6.2 J6.4(ID) R19.2
USB_VBUS: C48.1 CR6.6 J6.1(VCC) P4.19 R22.2 R66.1 U7.1(IN#1) U7.2(IN#2) U7.8(EN)
V-SENSE: C53.1 C55.1 C57.1 CR7.8(VCC) P7.1 P10.2 U8.2(VCCB) U9.2(VCCB) U10.2(VCCB)
XDS_RESET: R58.1 U5.40(PA6) U10.1(1NOE) U10.6(1A1)
XDS_RESET_LS: CR7.2(IO2) P4.11 P7.10 R57.2 U10.15(1B1)
XDS_RX: U5.33(PA0/U0RX) U8.8(2A1)
XDS_RX_LS: P4.13 R61.2 U8.13(2B1)
XDS_SWO: U5.25(PC4/C1-) U8.9(2A2)
XDS_SWO_LS: P4.1 R62.2 U8.12(2B2)
XDS_TCK: U5.35(PA2/SSI0CLK) U9.6(1A1)
XDS_TDI: U5.38(PA5/SSI0XDAT1) U9.7(1A2)
XDS_TDI_LS: CR7.3(IO3) P4.5 P7.8 U9.14(1B2)
XDS_TDO: U5.37(PA4/SSI0XDAT0) U9.9(2A2)
XDS_TDO_LS: CR7.5(IO4) P4.3 P7.6 R63.2 U9.12(2B2)
XDS_TMS: U5.36(PA3/SSI0FSS) U10.8(2A1)
XDS_TMS_DIR: U5.24(PC5/C1+) U10.5(2DIR)
XDS_TMS_LS: CR7.7(IO6) P4.9 P7.2 R65.2 U10.13(2B1)
XDS_TX: U5.34(PA1/U0TX) U8.6(1A1)
XDS_TX_LS: P4.15 U8.15(1B1)
XDS_VCC: C35.1 C36.1 C37.1 C38.1 C39.1 C40.1 C41.1 C42.1 C47.1 C49.1 C52.1 C54.1 C56.1 P4.17 P8.1(6) P10.1 R17.2 R18.2 R27.1 R30.2 R31.2 R33.2 R39.1 R58.2 U5.7(VDD#7) U5.8(VDDA) U5.16(VDD#16) U5.26(VDD#26) U5.28(VDD#28) U5.39(VDD#39) U5.47(VDD#47) U5.51(VDD#51) U5.52(VDD#52) U5.69(VDD#69) U5.79(VDD#79) U5.90(VDD#90) U5.101(VDD#101) U5.113(VDD#113) U5.122(VDD#122) U7.3(OUT#3) U7.4(OUT#4) U8.3(VCCA) U8.4(1DIR) U9.3(VCCA) U9.4(1DIR) U10.3(VCCA) U10.4(1DIR)
N1013277: U1.46(X24M_N) Y2.3
N1013855: C22.1 C73.1 L27.2 U11.10(PORT3-)
N1013859: C11.2 C72.2 L12.1 U11.1(PORT3+)
N1013899: C12.1 C22.2 L12.2 L13.1
N1013927: C13.1 L13.2 L14.1
N1013977: A1.1(FEED/GND_1) C23.1 C71.2
N1014101: C17.1 U1.4(X32K_Q1) Y1.1
N1014113: C18.1 U1.5(X32K_Q2) Y1.2
N1018952: U1.47(X24M_P) Y2.1
N1105722: CR1.2(A) R15.1
N1105771: CR2.2(A) R14.1
N1105824: P6.1 R14.2
N1106228: P6.3 R15.2
N1176544: J2.13 R46.1
N1176548: J2.15 R47.1
N1176568: J2.17 R48.1
N1177007: J2.19 R49.1
N1240270: CR7.6(IO5) P4.7 P7.4 U9.15(1B1)
N1288065: R55.1 SW2.3
N1288098: R56.1 SW1.4
N1299607: J2.11 R52.2
N1384129: R57.1 SW3.3
N1393569: C19.1 U1.23(DCOUPL)
N1403554: C58.1 C65.1 L28.2 L29.2 U1.3(RX_TX)
N1414078: C14.1 C15.1 C69.1 L14.2
N1417883: C63.1 L28.1 U1.1(RF_P)
N1418253: C64.1 L29.1 U1.2(RF_N)
N1419138: C21.2 L21.1 L31.2 U11.4(PORT2-)
N1419146: C60.1 L11.1 L31.1 U11.5(PORT2+)
N1419182: C60.2 C61.1 L21.2 L25.1
N1419210: C62.2 L25.2 L26.1
N1419230: A2.1(FEED_1) C24.1 C59.1
N1419286: C24.2 C67.1 C68.2 L26.2
N1420906: C64.2 U11.7(PORT1+)
N1421284: R67.2 R68.2 R69.1 U11.9(VDD)
N1433060: C15.2 C71.1 L32.1
N1447877: R59.1 U4.3(NWP/SIO2)
N1447884: R60.1 U4.7(NRST/SIO3)
N1465309: C63.2 U11.8(PORT1-)
N1466589: C69.2 P11.1
N1466981: C67.2 P12.1
N1587996: R17.1 R20.1 R21.1 U5.70(NRST)
N1588002: R30.1 U5.60(PK7)
N1588004: C47.2 R33.1 R34.2 U7.5(FB)
N1588016: R28.2 U5.59(RBIAS)
N1588028: R22.1 R24.1 U5.1(PD0/AIN15)
N1588034: C34.1 U5.89(OSC1) Y3.3
N1588038: C33.1 U5.88(OSC0) Y3.1
N1588066: C32.1 C50.1 R18.1 U5.9(VREFA+) U6.3(CATHODE)
N1588110: R19.1 U5.95(PB0/USB0ID)
N1588130: R39.2 U5.63(PK4)
N1588132: R29.1 U5.61(PK6)
N1588134: R27.2 U5.62(PK5)
N1588248: C46.1 R31.1 U5.68(VBAT)
N1588328: R23.2 U5.3(PD2/AIN13)
N1588330: R25.2 U5.4(PD3/AIN12)
N1588336: CR6.1 J6.M1(SHIELD1) J6.M2(SHIELD2) R32.2
N1588554: C70.1 R66.2 U5.96(PB1/USB0VBUS)
N15894280: CR4.2(A) R23.1
N15894940: CR5.2(A) R25.1

Pads without a net: CR7 1; CR8 1; FIDU1 1; FIDU2 1; FIDU3 1; FIDU4 1; FIDU5 1; FIDU6 1; J1 18; J2 8; LBL1 1; P5 7; P7 7; P8 7; U5 2 5 6 11 12 13 14 15 18 19 20 21 22 23 27 29 30 31 32 41 42 43 44 45 46 49 50 53 54 56 57 65 67 71 72 73 74 75 76 77 78 81 82 83 84 85 86 91 92 102 103 104 105 106 107 108 109 110 111 112 116 117 118 119 120 121 123 124 125 126 127 128; U6 2 4 5; U7 7; U8 14; U9 8; U10 14

## Via types
v1: diameter 0.4, hole 0.2, TOP to BOTTOM, 505 vias
v2: diameter 0.8, hole 0.4, TOP to BOTTOM, 21 vias
v3: diameter 0.5, hole 0.201, TOP to BOTTOM, 28 vias

## Routing (per net, layer and track width the routed paths; a pad name or vN(x,y) marks a point on that pad's centre or on a via; arc(x,y) is an arc through that point)
+5V: length 55.4
  L3 w0.5: P2.1 0.8,17.02 0.8,41.9 4.7,45.8 7.58,45.8 J1.2 8.92,46.22 14,51.3 P4.20
GND: length 172.9
  TOP w0.15: 10.39,54.62 P4.22 ; P4.22 12.54,54.62 ; P4.22 11.46,55.7 ; P4.22 11.46,53.54 ; 52.1,15.42 P1.3 ; P1.3 53.18,16.5 ; P1.3 51.02,16.5 ; P1.3 52.1,17.58 ; MH5.1 3,58.7 ; MH5.1 3,56.5 ; MH5.1 1.9,57.6 ; MH5.1 4.1,57.6 ; U8.1 19.91,60.61 U8.16 20.4,60.07 ; P1.2 53.18,13.96 ; P1.2 52.1,15.04 ; P1.2 51.02,13.96 ; P1.2 52.1,12.88 ; 28.5,59.79 28.21,60.07 U9.16 27.91,60.6 28,60.69 U9.1 ; U11.2 26.9,23.4 v1(27.13,23.16) 27.3,23.33 U11.3 ; 10.39,57.16 P4.21 ; P4.21 12.54,57.16 ; P4.21 11.46,56.08 ; P4.21 11.46,58.24 ; P2.3 7.48,16.5 ; P2.3 6.4,17.58 ; P2.3 5.32,16.5 ; P2.3 6.4,15.42 ; R68.1 22.23,24.4 22.1,24.27 v1(22.1,23.8) ; J1.4 10,41.92 ; J1.4 8.92,43 ; J1.4 7.85,41.92 ; J2.2 53.2,44.46 ; J2.2 52.12,43.38 ; J2.2 51.05,44.46 ; J2.2 52.12,45.54 ; 36.9,12.9 v1(36.8,13) ; 7.26,14.82 P2.2 6.4,15.04 ; U6.1 v1(12.8,62.3) ; U10.16 24.4,60.07 ; 28.02,18 28.45,18 ; 25.8,21.6 C11.1 v1(26.25,21.15) 26.4,21
  TOP w0.3: v1(34.45,15.15) C68.1 34.9,15.7 v1(34.4,16.2) ; 36.9,12.9 A2.2 37.92,13.58 ; v1(24.55,25.72) 24.7,25.58 C65.2 25.5,25.04 v1(25.16,24.7) ; 53.7,94.1 52.1,94.1 51.9,94.3 ; v1(31.6,19) 31.6,19.07 31.13,19.53 31.13,19.53 ; 57.3,90.6 57.3,89.1 ; C62.1 v1(34.8,19.3) ; C62.1 34.5,18.8 v1(35,18.3) ; C62.1 34.3,19.1 v1(33.9,19.5) ; v1(38.8,18) P12.M1 ; P12.M1 38.85,19.3 v1(39.5,19.3) ; P12.M1 v1(38.8,20.5) ; 23.17,19.53 23,19.37 23,19.1 v1(22.7,18.8) ; 23.17,19.53 v1(23.7,19) ; 23.17,19.53 23.33,19.7 v1(24.1,19.7) ; 31.13,19.53 v1(30.6,19) ; 31.13,19.53 v1(30.24,19.53) ; v1(20.6,14.8) C14.2 20.6,15.6 ; P11.2 v1(29,18.8) ; v1(19.65,19.45) 20.23,18.87 ; v1(19.8,15.6) 20.6,15.6 ; 20.6,15.6 v1(21.4,15.6) ; C58.2 29.38,25.58 v1(29.5,25.7) ; v1(28.6,17.9) 28.12,17.9 28.02,18 P11.M1 ; v1(26.1,19.7) 28.02,19.7 28.12,19.6 v1(28.6,19.6) ; P11.M2 27.3,19.65 v1(27.3,20.3) ; v1(19.5,18.4) 19.97,18.87 20.23,18.87 ; v1(20.7,19.5) 20.23,19.03 20.23,18.87 ; 53.8,88.9 54.5,89.6 54.5,90.7 ; P11.M1 v1(26,18) ; P11.M1 27.3,17.95 v1(27.3,17.2) ; v1(37.2,18) P12.M2 ; P12.M2 37.15,19.3 v1(36.5,19.3) ; P12.M2 v1(37.2,20.5) ; C59.2 v1(40.75,13.9) ; 57.4,94.3 MH4.1 ; P12.2 v1(38,20.9)
  TOP w0.38: v1(27.5,15.3) 27.52,15.32 C23.2 ; C23.2 v1(28.3,16.2) ; C23.2 27.52,16.92
  TOP w0.5: J6.5 12.7,88.6
  L2 w0.15: 4.65,92.7 MH3.1 2.5,90.55 ; P4.22 11.46,55.7 ; P4.22 12.54,54.62 ; P4.22 10.39,54.62 ; P4.22 11.46,53.54 ; 51.05,44.46 J2.2 ; J2.2 53.2,44.46 ; J2.2 52.12,45.54 ; J2.2 52.12,43.38 ; P1.3 52.1,17.58 ; P1.3 52.1,15.42 ; P1.3 51.02,16.5 ; P1.3 53.18,16.5 ; P4.21 11.46,58.24 ; P4.21 12.54,57.16 ; P4.21 11.46,56.08 ; P4.21 10.39,57.16 ; 8.92,40.84 J1.4 ; J1.4 8.92,43 ; J1.4 10,41.92 ; J1.4 7.85,41.92 ; MH5.1 3,58.7 ; MH5.1 1.9,57.6 ; MH5.1 3,56.5 ; MH5.1 4.1,57.6 ; 5.32,16.5 P2.3 ; P2.3 6.4,15.42 ; P2.3 6.4,17.58 ; P2.3 7.48,16.5 ; 52.1,12.88 P1.2 ; P1.2 52.1,15.04 ; P1.2 51.02,13.96 ; P1.2 53.18,13.96 ; 53.65,92.7 MH4.1 55.8,90.55 ; 6.4,15.04 P2.2 7.26,14.82
  L2 w0.38: v1(35.5,15.1) v1(34.4,16.2)
  BOTTOM w0.15: P4.21 11.46,58.24 ; P4.21 11.46,56.08 ; P4.21 10.39,57.16 ; P4.21 12.54,57.16 ; 3,56.5 MH5.1 ; MH5.1 3,58.7 ; MH5.1 4.1,57.6 ; MH5.1 1.9,57.6 ; P4.22 12.54,54.62 ; P4.22 11.46,55.7 ; P4.22 10.39,54.62 ; P4.22 11.46,53.54 ; 5.32,16.5 P2.3 ; P2.3 7.48,16.5 ; P2.3 6.4,15.42 ; P2.3 6.4,17.58 ; 7.26,14.82 P2.2 6.4,15.04 ; P1.3 52.1,17.58 ; P1.3 51.02,16.5 ; P1.3 52.1,15.42 ; P1.3 53.18,16.5 ; J2.2 53.2,44.46 ; J2.2 52.12,45.54 ; J2.2 51.05,44.46 ; J2.2 52.12,43.38 ; P1.2 53.18,13.96 ; P1.2 52.1,15.04 ; P1.2 52.1,12.88 ; P1.2 51.02,13.96 ; J1.4 8.92,43 ; J1.4 8.92,40.84 ; J1.4 7.85,41.92 ; J1.4 10,41.92
  vias: v1(1.4,71) v1(1.4,45.9) v1(1.4,28) v1(1.4,23.1) v1(1.5,14.9) v1(1.6,72.5) v1(1.6,67.6) v1(1.7,41) v1(1.9,17.7) v1(2.1,87.28) v1(2.1,84.74) v1(2.3,74.4) v1(2.5,16.8) v1(2.6,53.2) v1(3.37,83.47) v1(3.6,61.7) v1(4.2,81.6) v1(4.3,22.7) v1(4.4,14.8) v1(4.5,60.6) v1(4.7,81) v1(5.1,71.3) v1(6.3,19) v1(6.4,62) v1(7.1,60.6) v1(7.5,82.6) v1(8,14.9) v1(9,65.2) v1(9,14.9) v1(9.2,19.2) v1(9.8,14.9) v1(9.9,54.2) v1(10,84.3) v1(10,16.7) v1(10.4,81.6) v1(10.5,19.2) v1(10.6,14.9) v1(10.7,85.3) v1(10.9,17.8) v1(11.1,25.6) v1(11.2,57.1) v1(11.3,62.1) v1(11.5,46) v1(11.8,78) v1(11.8,65.2) v1(11.83,22.29) v1(12.6,29.3) v1(12.7,27) v1(12.83,15.59) v1(12.8,14.9) v1(12.9,17.4) v1(13.3,27.9) v1(13.3,19.9) v1(13.4,41.4) v1(13.5,88.2) v1(13.6,23.1) v1(13.6,21.4) v1(13.8,87.3) v1(13.8,32.2) v1(14,30.5) v1(14.2,38.7) v1(14.3,82.6) v1(14.5,88.3) v1(14.7,29.5) v1(15.1,19.8) v1(15.3,14.9) v1(15.8,87.4) v1(15.8,17) v1(15.9,30.8) v1(16,20.7) v1(16,18.9) v1(16.2,15.7) v1(16.3,61.8) v1(16.3,17.7) v1(16.4,32.6) v1(16.4,14.9) v1(16.65,20.6) v1(16.65,19) v1(16.8,91.8) v1(16.8,41.3) v1(16.9,29.3) v1(17.1,16.7) v1(17.1,14.9) v1(17.3,78) v1(17.3,21.9) v1(17.4,17.5) v1(17.37,15.83) v1(17.6,81.4) v1(17.7,61.4) v1(17.8,53) v1(17.75,18.7) v1(17.8,15.3) v1(17.9,86.8) v1(17.9,71.3) v1(17.9,47.5) v1(18,74.2) v1(18.3,82.4) v1(18.33,14.8) v1(18.4,17.2) v1(18.8,16.2) v1(18.9,84.2) v1(19,25.1) v1(19,23) v1(19.1,17.8) v1(19.2,15.1) v1(19.3,61.8) v1(19.3,61.1) v1(19.4,26) v1(19.5,22) v1(19.7,14.8) v1(20.1,24.4) v1(20.1,21.6) v1(20.2,38.7) v1(20.5,48.5) v1(20.7,63.9) v1(20.7,53.6) v1(20.7,29.1) v1(20.8,59.4) v1(20.8,26.5) v1(21,32.6) v1(21,22.5) v1(21.2,17.3) v1(21.3,71.1) v1(21.3,20.3) v1(21.9,18) v1(21.9,17.3) v1(21.9,14.9) v1(22,21.9) v1(22,21.1) v1(22.1,37.1) v1(22.1,15.5) v1(22.3,69.2) v1(22.4,17.6) v1(22.5,18.2) v1(22.6,15) v1(22.8,22.6) v1(22.9,30.8) v1(23,18) v1(23.1,87) v1(23.1,61.8) v1(23.1,61.2) v1(23.2,26.7) v1(23.2,23.7) v1(23.22,15.1) v1(23.3,32.6) v1(23.3,23) v1(23.4,26) v1(23.4,18.5) v1(23.5,30.3) v1(23.6,28.1) v1(23.7,38.8) v1(23.7,33) v1(23.7,28.8) v1(23.8,24.3) v1(24.1,19.3) v1(24.15,27.7) v1(24.3,63.7) v1(24.3,26.6) v1(24.33,24.77) v1(24.3,14.8) v1(24.4,15.3) v1(24.62,19.6) v1(24.7,92.8) v1(24.8,20.3) v1(24.8,17.1) v1(25.1,65.9) v1(25.1,59.6) v1(25.3,19.7) v1(25.3,17.5) v1(25.5,63.3) v1(25.48,21.08) v1(25.7,17.1) v1(25.9,28.2) v1(26.4,17.1) v1(26.45,59.7) v1(26.6,14.9) v1(26.7,39.8) v1(26.7,39.3) v1(26.8,48.6) v1(27.1,22.6) v1(27.1,21.7) v1(27.1,20.8) v1(27.2,39.8) v1(27.2,39.3) v1(27.3,61.73) v1(27.3,61.2) v1(27.5,64.2) v1(27.8,21.9) v1(27.9,21.1) v1(28.2,15.2) v1(28.34,62.8) v1(28.5,59.8) v1(28.5,13.1) v1(28.6,14.7) v1(28.6,13.9) v1(28.72,21.08) v1(28.9,43.3) v1(29.1,24.5) v1(29.2,20.2) v1(29.3,17.2) v1(29.4,13.1) v1(29.7,60.1) v1(29.65,25) v1(29.7,15) v1(29.8,24) v1(29.8,18.3) v1(30.1,13.1) v1(30.2,63.6) v1(30.3,24.6) v1(30.8,23.9) v1(30.8,23.1) v1(31,13.1) v1(31.1,17.1) v1(31.4,59) v1(31.5,14.5) v1(32.2,92.1) v1(32.2,22.2) v1(32.3,15.2) v1(32.3,13) v1(32.4,17.1) v1(32.4,15.9) v1(33,60.8) v1(33.1,21.4) v1(33.1,13) v1(33.2,24.7) v1(33.4,16.6) v1(33.5,22.2) v1(33.6,36.5) v1(33.8,13) v1(34,21.4) v1(34.2,48.3) v1(34.2,40.5) v1(34.3,22.4) v1(34.5,46.7) v1(34.6,42.4) v1(34.6,13) v1(34.8,36.2) v1(34.82,33.9) v1(34.8,30.27) v1(35.1,21.4) v1(35.6,63.6) v1(35.7,24.7) v1(35.7,13.8) v1(35.85,29.45) v1(36.5,60.6) v1(36.5,17.2) v1(36.65,13.75) v1(36.8,50) v1(37.1,53.3) v1(37.3,23.8) v1(37.8,63.5) v1(38.1,15.98) v1(38.9,16.8) v1(39.4,65.9) v1(39.4,21.2) v1(39.5,59.4) v1(39.5,16.2) v1(39.6,62.1) v1(39.8,13) v1(39.9,14.6) v1(40.1,51.8) v1(40.1,15.4) v1(40.7,13.1) v1(41,16.6) v1(41.6,56.1) v1(41.6,17.5) v1(42,13.1) v1(42.1,51.1) v1(42.4,41.6) v1(42.4,16.1) v1(42.5,35.9) v1(42.5,32) v1(43.1,51.2) v1(43.2,13.1) v1(43.4,27.9) v1(43.4,25.7) v1(43.53,19.13) v1(43.8,16.6) v1(44.2,13.1) v1(44.3,38.5) v1(44.5,65.9) v1(44.8,44.8) v1(45.2,31.2) v1(45.2,13.1) v1(45.6,93.2) v1(45.8,51) v1(45.9,23) v1(45.9,15.1) v1(46.1,60.8) v1(46.1,13.1) v1(47.1,42.7) v1(47.3,49.5) v1(47.3,36.2) v1(47.3,13.1) v1(47.5,33.7) v1(47.5,17.7) v1(47.8,25.4) v1(48,53.9) v1(48.2,13.1) v1(49.2,13.1) v1(49.7,16.2) v1(50.4,46.6) v1(51,89.9) v1(51,64.6) v1(51,22.8) v1(52.8,51.8) v1(53.1,18.7) v1(53.3,50.6) v1(53.7,14.3) v1(53.9,35) v1(53.9,23.4) v1(54,28.5) v1(54.3,53.9) v1(55.6,13) v1(55.7,20.6) v1(56.4,55.7) v1(56.9,83.7) v1(56.9,25.1) v1(57,71.9) v1(57.1,39.2) v1(57.6,45.5) v1(57.6,14.3) v3(13.2,86) v3(13.2,85.1) v3(13.2,84.2) v3(27.6,34.6) v3(27.6,33.6) v3(27.6,32.6) v3(27.6,31.6) v3(27.6,30.6) v3(28.6,34.6) v3(28.6,33.6) v3(28.6,32.6) v3(28.6,31.6) v3(28.6,30.6) v3(29.6,34.6) v3(29.6,33.6) v3(29.6,32.6) v3(29.6,31.6) v3(29.6,30.6) v3(30.6,34.6) v3(30.6,33.6) v3(30.6,32.6) v3(30.6,31.6) v3(30.6,30.6) v3(31.6,34.6) v3(31.6,33.6) v3(31.6,32.6) v3(31.6,31.6) v3(31.6,30.6)
VDDC: length 16.2
  TOP w0.2: C45.1 C44.1 C43.1 2.5,70.6 U5.115 7.3,70.6 8.9,72.2 U5.87
VDDR: length 26.2
  TOP w0.3: U1.45 25.12,31.32 C16.1 24.6,30.9 24.07,31.43 23.4,31.43 23.23,31.6 v1(23.1,31.6) ; C9.1 25.65,28.8 26.18,29.32 U1.48
  TOP w0.4: L1.2 C8.1 28.4,40.82 27.43,41.8 v1(24.1,41.8) ; v1(25.25,29.45) 25.1,29.3 C9.1
  L3 w0.4: v1(25.25,29.45) v1(23.1,31.6) 22.7,32 22.7,40.4 v1(24.1,41.8)
VDDS: length 64.7
  TOP w0.15: R1.2 24.9,37.6 24.8,37.7 ; v1(21.2,25.2) 21.7,25.2 R67.1
  TOP w0.3: v1(34.9,35.4) 34.9,35.33 34.3,34.73 C4.1 34.12,34.32 U1.22 ; U1.34 27.9,36.8 27.47,37.23 27.47,37.23 27,37.69 C7.1 26.9,37.8 C6.1 24.7,37.8 ; U1.13 34.08,29.82 C3.1 v1(34.2,30.28) ; v1(24.4,32.7) 24.6,32.5 24.6,32 C5.1 25.15,32 25.33,31.82 U1.44
  TOP w0.4: 24.8,37.7 v1(24.4,38.1)
  TOP w0.5: v1(26.5,42.5) 26.7,42.7 FL1.1
  L3 w0.15: v1(26.5,42.5) 22.7,42.5 19.6,39.4 19.6,26.8 v1(21.2,25.2)
  L3 w0.5: v1(24.4,32.7) v1(24.4,38.1) 24.4,40.4 v1(26.5,42.5) 26.5,41.7 32.8,35.4 v1(34.9,35.4) 34.22,34.72 34.22,33.19 34.2,33.17 v1(34.2,30.28)
CC1350_RESET: length 72.4
  TOP w0.15: v1(24.16,48.8) 24.46,49.1 28.38,49.1 v1(29.07,48.4) 29.07,46.62 28.75,46.3 22.08,46.3 22.06,46.29 22.04,46.29 21.98,46.26 21.92,46.22 21.86,46.16 19.2,43.69 19.2,37.25 19.54,36.9 21.12,36.9 22.02,36 23.3,36 23.5,36.2 C20.1 R1.1 25.7,36.2 26.17,36.67 27.06,36.67 27.4,36.33 U1.35 ; R52.1 R51.2 45.2,46 46.4,47.2 46.4,48.3 ; 46.4,48.3 46.4,51.33 45.68,52.05 P5.10 ; 46.4,48.3 46,47.9 39.9,47.9 v1(39.1,48.7) ; CR8.2 38.7,50.03 v1(38.54,49.88)
  L3 w0.15: P4.12 v1(24.16,48.8) ; v1(38.54,49.88) 38.54,49.26 v1(39.1,48.7) 38.28,47.88 29.6,47.88 v1(29.07,48.4)
CC1350_RXD: length 81.9
  TOP w0.15: v1(37.4,48.9) 38,48.9 39.9,47 39.9,30.7 36.57,27.38 35.43,27.38 35.25,27.2 31.52,27.2 30.03,28.69 30.03,28.75 29.9,28.88 U1.7 ; J1.7 5,38.22 5,44.77 10.33,50.1 21.1,50.1 v1(21.5,49.7) 21.9,50.1 27.82,50.1 28.03,49.9 v1(28.5,49.9)
  L3 w0.15: v1(37.4,48.9) 37.12,49.19 29.91,49.19 29.2,49.9 v1(28.5,49.9) ; P4.16 20.28,53.43 20.28,53.42 20.52,53.18 20.53,53.18 21.5,52.2 v1(21.5,49.7)
CC1350_SW_PWR: length 35.1
  TOP w0.15: U1.43 25.57,32.33 24.3,33.6 21.03,33.6 21.03,33.6 20.2,34.43 19.4,34.43 ; 19.4,34.43 11.53,34.43 10.3,33.2 10.3,28.06 J1.16 ; 19.4,34.43 19.4,27.5 19.97,26.93 22,26.93 22.7,26.23 R69.2
CC1350_SWO: length 43.1
  TOP w0.15: P4.2 34.71,52.46 34.66,52.46 34.33,52.13 34.32,52.13 34.07,51.88 34.07,51.88 v1(33.9,51.7) ; v1(31.7,52.1) 31.7,39.98 31.53,39.8 v1(31.53,39.4) 31.53,37.4 30.9,36.78 U1.28
  L3 w0.15: v1(33.9,51.7) 33.5,52.1 v1(31.7,52.1) ; v1(31.53,39.4) 39.48,39.4 42.34,36.54 46.26,36.54 48.5,34.3 J2.9
CC1350_TCK: length 61.2
  TOP w0.15: P5.4 41.87,53.35 41.32,52.8 39.57,52.8 39.44,52.93 38.96,52.93 38.7,52.67 ; 38.7,52.67 CR8.6 ; 38.7,52.67 v1(38.7,53.5) ; P4.8 30.29,55.67 34.76,55.67 35.37,55.06 35.37,53.78 33.11,51.51 33.11,38.49 v1(32.82,38.2) 32.82,37.42 32.4,37 U1.25 ; R47.2 v1(40.8,26.7)
  L3 w0.15: v1(38.7,53.5) 38.7,54.4 37.4,55.7 30.32,55.7 P4.8 ; v1(40.8,26.7) 40.51,26.99 39.76,26.99 36.03,30.72 36.03,37.05 34.88,38.2 v1(32.82,38.2)
CC1350_TMS: length 55.7
  TOP w0.15: U1.24 33.13,36.83 v1(33.2,36.9) 33.49,37.19 33.49,50.69 34.07,51.28 34.08,51.28 34.5,51.7 v1(34.5,51.7) 35.1,52.3 CR8.7 38.2,53.8 38.5,54.1 P5.2 ; R46.2 41.6,29.18 42.3,28.47 v1(42.3,25.3)
  L3 w0.15: v1(33.2,36.9) 33.49,37.19 34.62,37.19 35.38,36.43 35.38,30.52 40.6,25.3 v1(42.3,25.3) ; P4.10 27.75,53.57 32.63,53.57 v1(34.5,51.7)
CC1350_TXD: length 77.7
  TOP w0.15: U1.8 30.4,28.8 31.7,27.5 35.12,27.5 35.3,27.68 36.45,27.68 39.6,30.83 39.6,46.63 v1(37.76,48.46) ; v1(28.9,49.4) 28,49.4 27.6,49.8 23.9,49.8 v1(23.6,49.5) 23.3,49.2 21,49.2 20.4,49.8 10.45,49.8 7.46,46.81 7.46,43.96 6.8,43.3 5.8,43.3 5.3,42.8 5.3,40.46 J1.5
  L3 w0.15: P4.14 23.6,52.64 v1(23.6,49.5) ; v1(37.76,48.46) 37.14,48.46 36.8,48.8 29.5,48.8 v1(28.9,49.4)
CC1350_VDD: length 180
  TOP w0.15: v1(35.8,25.5) C30.1 U4.8 ; v1(2.75,18.05) 3.35,18.65 2.75,19.25
  TOP w0.3: R59.2 36.68,22.1 R11.2 36.22,21.8 v1(36.1,21.8) ; CR8.8 37.7,51.55 37.2,51.05 v1(37.2,50.8) 37.2,50.3 38.22,49.28 39.82,49.28 40.05,49.5 P5.1 ; R60.2 36.4,25.82 C30.1
  TOP w0.5: FL1.2 v1(26.7,45.8)
  L3 w0.15: J1.1 1.9,39.98 1.9,18.9 v1(2.75,18.05)
  L3 w0.3: v1(36.1,21.8) 38.91,24.61 ; 39.5,47.3 39.7,47.5 39.7,50.21 39.11,50.8 v1(37.2,50.8)
  L3 w0.5: 26.7,47.6 22.59,47.6 ; 26.7,47.6 28.33,47.6 28.63,47.3 49.9,47.3 ; 26.7,47.6 v1(26.7,45.8) ; 22.59,47.6 22.35,47.6 16.54,53.41 P4.18 ; 22.59,47.6 18.19,43.2 7.64,43.2 J1.1 ; 49.9,47.3 51.9,47.3 57.75,41.45 57.75,17.07 P1.1 38.02,25.5 v1(35.8,25.5) ; 49.9,47.3 P10.3
DCDC_SW: length 1.9
  TOP w0.3: U1.33 28.4,37.55 28.4,37.55 L1.1
DIO1_RF_SW: length 86.8
  TOP w0.15: U11.6 28.13,24.85 28.18,24.9 v1(28.6,24.9) ; 30.59,27.49 30.71,27.36 30.93,27.36 31.39,26.9 35.38,26.9 35.55,27.07 36.7,27.07 40.3,30.68 40.3,39.78 40.4,39.88 40.4,44.7 40.5,44.8 v1(40.5,45.2) ; 30.59,27.49 30.41,27.49 29.4,28.5 U1.6 ; 30.59,27.49 30.55,27.45 v1(30.55,27.45) ; v1(11.7,37.1) 12.1,37.1 12.3,36.9 18.5,36.9 18.8,37.2 18.8,43.73 21.73,46.46 21.84,46.53 21.95,46.58 22,46.59 22.06,46.6 22.19,46.6 22.22,46.6 27.49,46.6 27.69,46.8 v1(28.1,46.8) ; v1(11.3,33.5) 11.3,32.6 10.9,32.2 10.9,27.7 10.3,27.1 10.3,22.98 J1.20
  L3 w0.15: v1(28.1,46.8) 28.38,46.51 28.38,46.41 29.03,45.78 36.03,45.78 36.6,45.2 v1(40.5,45.2) ; v1(28.6,24.9) 28.6,25.5 v1(30.55,27.45) ; v1(11.7,37.1) 11.3,36.7 v1(11.3,33.5)
DIO4_SCL: length 94.3
  TOP w0.15: v1(34.8,50.42) 35.2,50.42 39.3,46.32 39.3,30.95 36.32,27.97 35.18,27.97 35,27.8 31.92,27.8 30.9,28.82 U1.9 ; v1(30.7,50.8) 30.22,50.8 29.43,51.6 9.7,51.6 3.5,45.4 3.5,27.02 J1.17 5.3,23.06 5.3,21.8 R2.1
  L3 w0.15: v1(34.8,50.42) 31.08,50.42 v1(30.7,50.8)
DIO5_SDA: length 93.7
  TOP w0.15: v1(35,49.9) 39,45.9 39,31.08 36.2,28.28 35.05,28.28 34.95,28.18 31.97,28.18 31.4,28.74 U1.10 ; v1(30.6,50.2) 30.31,50.49 29.97,50.49 29.15,51.3 9.83,51.3 3.8,45.27 3.8,27.2 5.8,25.2 6.81,25.2 7.5,24.51 7.5,22.72 J1.19 4.42,19.64 4.34,19.64 R3.1
  L3 w0.15: v1(30.6,50.2) 30.9,49.9 v1(35,49.9)
DIO6_RLED: length 74.2
  TOP w0.15: U1.11 31.9,28.75 32.17,28.47 34.82,28.47 34.93,28.57 36.07,28.57 38.7,31.2 38.7,41.05 38.5,41.25 v1(38.5,44.2)
  L3 w0.15: J2.3 50.63,42.97 50.63,44.97 50,45.6 49.2,45.6 47.8,44.2 v1(38.5,44.2) 37.88,44.2 37.87,44.19 22.98,44.19 18.85,40.05 18.85,39.63 18.85,32.56 15.5,29.21 P6.2
DIO7_GLED: length 65.8
  TOP w0.15: v1(38.03,43.6) 38.03,41.3 38.4,40.93 38.4,31.33 35.95,28.88 33.03,28.88 32.8,29.1 U1.12
  L3 w0.15: P6.4 19.15,27.65 19.15,39.75 23.28,43.88 37.74,43.88 v1(38.03,43.6) 48.72,43.6 J2.1
DIO8_MISO: length 29.8
  TOP w0.15: v1(41.2,28.35) 40.15,28.35 39.3,27.5 39.3,24.1 38.75,23.55 37.96,23.55 37.7,23.29 U4.2 ; v1(37.13,30.69) 36.73,30.69 36.72,30.7 33.78,30.7 33.41,30.32 U1.14
  L3 w0.15: v1(37.13,30.69) 40.12,27.7 40.55,27.7 v1(41.2,28.35) 41.75,28.35 43.8,30.4 50.94,30.4 J2.14
DIO9_MOSI: length 27.1
  TOP w0.15: U4.5 38.7,27.59 41.4,30.29 41.4,31.1 v1(41.7,31.4) ; U1.15 33.43,30.82 33.72,31.12 36.97,31.12 37.31,31.12 v1(37.6,31.4)
  L3 w0.15: v1(37.6,31.4) v1(41.7,31.4) 42.3,31.4 43,30.7 51.06,30.7 J2.12
DIO10_SCLK: length 88
  TOP w0.15: v1(30,46.3) 30,49.6 28.9,50.7 10.08,50.7 4.4,45.02 4.4,31.2 J1.13 ; U4.6 38.2,25.93 38.4,26.13 38.4,27.72 41.1,30.42 41.1,31.7 41.3,31.9 v1(41.3,32.3) ; v1(37.7,46.3) 37.99,46.01 37.99,45.43 37.6,45.05 37.6,41.3 38.1,40.8 38.1,32.6 37.69,32.19 37.69,32.18 v1(37.4,31.9) 37.32,31.9 36.95,31.53 33.7,31.53 33.5,31.32 U1.16
  L3 w0.15: v1(37.7,46.3) 37.3,46.3 37.1,46.1 30.6,46.1 30.4,46.3 v1(30,46.3) ; v1(37.4,31.9) 37.8,32.3 v1(41.3,32.3)
DIO11_CS: length 27.8
  TOP w0.15: v1(37.6,40.5) 37.6,40.1 37.8,39.9 37.8,32.9 36.72,31.82 U1.17
  L3 w0.15: v1(37.6,40.5) 51,40.5 J2.6
DIO12: length 35.5
  TOP w0.15: v1(37.43,45.7) 37.43,45.3 37.3,45.17 37.3,40.9 37.1,40.7 37.1,40.1 37.5,39.7 37.5,33.1 36.6,32.2 33.62,32.2 33.5,32.33 U1.18
  L3 w0.15: J2.4 50.93,43.11 50.93,45.37 50.4,45.9 49.07,45.9 48.88,45.7 v1(37.43,45.7)
DIO13_BTN1: length 73.5
  TOP w0.15: v1(34.25,50.85) 34.25,49.95 37,47.2 37,41.1 36.8,40.9 36.8,39.9 37.2,39.5 37.2,35.2 37.18,35.18 37.18,35.09 v1(36.89,34.8) 36.89,34.21 37.2,33.9 37.2,33.3 36.63,32.72 36.62,32.72 36.4,32.5 33.8,32.5 33.6,32.7 33.55,32.7 33.42,32.83 U1.19 ; R56.2 6.38,48.7 9.58,51.9 29.8,51.9 30.3,51.4 v1(30.7,51.4) ; v1(41.3,33.5) 41.7,33.5 42,33.2 45.7,33.2 48.5,30.4 50.4,30.4 51.07,29.73 51.07,28.76 52.12,27.71 J2.16
  L3 w0.15: v1(41.3,33.5) 38.19,33.5 v1(36.89,34.8) ; v1(34.25,50.85) 31.65,50.85 31.1,51.4 v1(30.7,51.4)
DIO14_BTN2: length 52.9
  TOP w0.15: v1(41.26,32.94) 41.84,32.94 41.88,32.9 45.5,32.9 47.8,30.6 v1(47.8,29.8) ; v1(36.77,33.47) 36.49,33.19 36.49,33.19 36.1,32.8 34.01,32.8 33.48,33.32 U1.20 ; R55.2 53.7,46.52 55.7,44.52 55.7,24.8 55.9,24.6 v1(55.9,24.2)
  L3 w0.15: v1(55.9,24.2) 55.5,24.2 55.44,24.14 J2.18 50.86,25.4 49.38,25.4 47.8,26.98 v1(47.8,29.8) ; v1(36.77,33.47) 37.73,33.47 38.26,32.94 v1(41.26,32.94)
DIO15: length 33.4
  TOP w0.15: J2.20 53.3,22.78 53.3,29.6 52.2,30.7 48.7,30.7 45.9,33.5 42.23,33.5 41.7,34.03 v1(41.3,34.03) ; U1.21 33.41,33.82 34.13,33.1 35.8,33.1 36.47,33.76 36.47,35.34 v1(36.75,35.62)
  L3 w0.15: v1(36.75,35.62) 38.35,34.03 v1(41.3,34.03)
DIO16_TDO: length 50.1
  TOP w0.15: P5.6 43.14,53.35 42.09,52.3 v1(39.8,52.3) CR8.5 ; R48.2 41.6,24.12 40.8,24.93 40.8,25.8 v1(40.4,26.2) ; U1.26 31.9,36.93 32.3,37.32 v1(32.3,37.8) 32.3,38.4 32.7,38.8 32.7,53 P4.4
  L3 w0.15: v1(32.3,37.8) 32.6,37.5 34.8,37.5 35.7,36.6 35.7,30.62 39.84,26.49 40.12,26.49 v1(40.4,26.2) ; v1(39.8,52.3) 36.64,52.3 P4.4
DIO17_TDI: length 60.8
  TOP w0.15: R49.2 41.6,22.4 42.4,23.2 42.4,24.5 41.6,25.3 v1(41.6,25.72) ; U1.27 31.4,36.85 31.88,37.32 31.88,37.98 32,38.1 v1(32,38.7) 32.28,38.99 32.28,53.09 31.78,53.59 P4.6 ; CR8.3 v1(39.2,50) 39.6,50 41.5,51.9 42.96,51.9 44.41,53.35 P5.8
  L3 w0.15: v1(32,38.7) 35.2,38.7 36.1,37.8 36.1,37.4 36.32,37.18 36.32,30.85 39.88,27.3 40.9,27.3 41.6,26.6 v1(41.6,25.72) ; P4.6 32.51,53.89 33.51,53.89 36.78,50.63 36.78,50.62 37.02,50.38 37.03,50.38 37.08,50.32 38.88,50.32 39.12,50.08 v1(39.2,50)
DIO19_CTS: length 24.7
  TOP w0.15: U1.29 30.4,36.8 31,37.4 31,39.97 31.12,40.1 v1(31.12,40.5)
  L3 w0.15: J2.7 42.46,36.84 39.6,39.7 31.93,39.7 v1(31.12,40.5)
DIO20_FLASH_CS: length 52
  TOP w0.15: v1(31.1,43.3) 30.7,42.9 30.7,37.6 29.9,36.8 U1.30 ; v1(41,43.1) 40.72,42.82 v1(40.72,39.6) 40.72,30.68 36.82,26.78 35.68,26.78 34.8,25.9 34.8,24.1 35.8,23.1 R11.1 U4.1
  L3 w0.15: J2.5 48.56,39.38 48.34,39.6 v1(40.72,39.6) ; v1(41,43.1) 37.92,43.1 37.44,43.59 31.38,43.59 v1(31.1,43.3)
DIO21: length 63
  TOP w0.15: J1.15 4.1,28.96 4.1,45.15 9.95,51 29.03,51 30.3,49.72 30.3,48.2 30.8,47.7 30.8,44.1 30.7,44 30.7,43.97 30.4,43.68 30.4,37.8 29.4,36.8 U1.31
DIO22: length 53.4
  TOP w0.15: U1.32 28.9,36.72 30.1,37.93 30.1,43.8 30.4,44.1 30.4,45.43 29.95,45.88 29.82,45.88 29.57,46.12 29.57,46.53 29.5,46.6 29.5,49.68 28.78,50.4 10.2,50.4 4.7,44.9 4.7,35.98 J1.9
DIO23_ANALOG: length 24.7
  TOP w0.15: U1.36 25.97,36.05 25.62,35.7 21.9,35.7 21,36.6 11.2,36.6 10.6,37.2 10.6,39.7 9.5,40.8 7.5,40.8 J1.3
DIO24_ANALOG: length 30.8
  TOP w0.15: J1.11 7.8,33.18 7.8,39.8 8.43,40.43 9.37,40.43 10.3,39.5 10.3,37 11,36.3 20.87,36.3 21.77,35.4 25.5,35.4 25.57,35.33 U1.37
DIO25_ANALOG: length 20
  TOP w0.15: U1.38 25.57,34.82 25.4,35 25.3,35.1 21.65,35.1 20.75,36 10.8,36 10,36.8 10,38.3 J1.6
DIO26_ANALOG: length 18.3
  TOP w0.15: U1.39 25.57,34.32 25.1,34.8 21.52,34.8 20.62,35.7 10.06,35.7 J1.8
DIO27_ANALOG: length 18.3
  TOP w0.15: U1.40 25.57,33.82 24.9,34.5 21.4,34.5 20.57,35.33 9.95,35.33 J1.10
DIO28_ANALOG: length 19.9
  TOP w0.15: J1.12 8.92,32.79 11.16,35.03 20.45,35.03 21.27,34.2 24.7,34.2 25.57,33.32 U1.41
DIO29_ANALOG: length 22.1
  TOP w0.15: U1.42 25.57,32.83 24.5,33.9 21.15,33.9 20.32,34.73 11.33,34.73 10,33.4 10,31.32 8.92,30.25 J1.14
IRSTN: length 16.5
  TOP w0.15: v1(3.5,82.1) 5.3,83.9 v1(5.3,85.5) ; v1(6.82,85.5) 9.5,85.5 11.2,83.8 11.2,81.5 11.8,80.9 R20.2 14.4,80.9
  L3 w0.15: v1(5.3,85.5) v1(6.82,85.5)
ITCK: length 12.2
  TOP w0.15: U5.100 2,76.6 0.8,77.8 0.8,84.7 v1(2.1,86)
ITDI: length 10.1
  TOP w0.15: v1(3.38,84.7) 2.8,84.12 2.8,82.5 1.44,81.14 1.44,78.01 2.05,77.4 U5.98
ITDO: length 13.2
  TOP w0.15: v1(3.4,87.3) 4.8,85.9 4.8,84.08 1.74,81.01 1.74,78.14 2.08,77.8 U5.97
ITMS: length 9
  TOP w0.15: 3.8,77 2.03,77 1.14,77.89 1.14,82.54 v1(2.1,83.5)
LP_RESET: length 22.1
  TOP w0.15: R51.1 43.88,44.4 41.6,42.12 41.6,35.03 42.53,34.1 46.15,34.1 47.05,33.2 51.02,33.2 J2.10
Net_7: length 1.7
  TOP w0.15: v1(20.7,69) 20.3,68.6 19.2,68.6
Net_24:
  vias: v2(21.6,6.18) v2(23.6,1.18)
Net_25:
  vias: v2(19.6,6.18) v2(21.6,1.18)
Net_26:
  vias: v2(17.6,6.18) v2(19.6,1.18)
Net_27:
  vias: v2(15.6,6.18) v2(17.6,1.18)
Net_28:
  vias: v2(13.6,6.18) v2(15.6,1.18)
Net_29:
  vias: v2(11.6,6.18) v2(13.6,1.18)
Net_30:
  vias: v2(9.6,6.18) v2(11.6,1.18)
Net_31:
  vias: v2(7.6,6.18) v2(9.6,1.18)
Net_32:
  vias: v2(5.6,6.18) v2(5.6,1.18) v2(7.6,1.18)
Net_33:
  vias: v2(23.6,6.18) v2(25.6,1.18)
USB_DM: length 14.1
  TOP w0.15: CR6.5 10.8,88.85 v1(10.75,88.9) J6.2 ; v1(8.7,86.9) 7.3,86.9 6.4,86 6.4,80.1 6.5,80 U5.93
  L3 w0.15: v1(10.75,88.9) 10.75,88.88 9.06,87.19 8.99,87.19 v1(8.7,86.9)
USB_DP: length 15.5
  TOP w0.15: U5.94 6.1,86.12 7.36,87.38 8.91,87.38 v1(9.4,86.9) ; 11.3,88.19 11.3,88.8 v1(11.4,88.9) J6.3
  L3 w0.15: v1(9.4,86.9) v1(11.4,88.9)
USB_ID: length 14.2
  TOP w0.15: R19.2 5.6,82.68 5.8,82.88 5.8,86.25 7.25,87.7 9.4,87.7 10.1,87 v1(10.8,87) CR6.2 ; J6.4 v1(12.05,88.9)
  L3 w0.15: v1(10.8,87) 10.8,87.65 v1(12.05,88.9)
